# EAGLE board Rosi (EAGLE 7.2.0), part 1 of 2
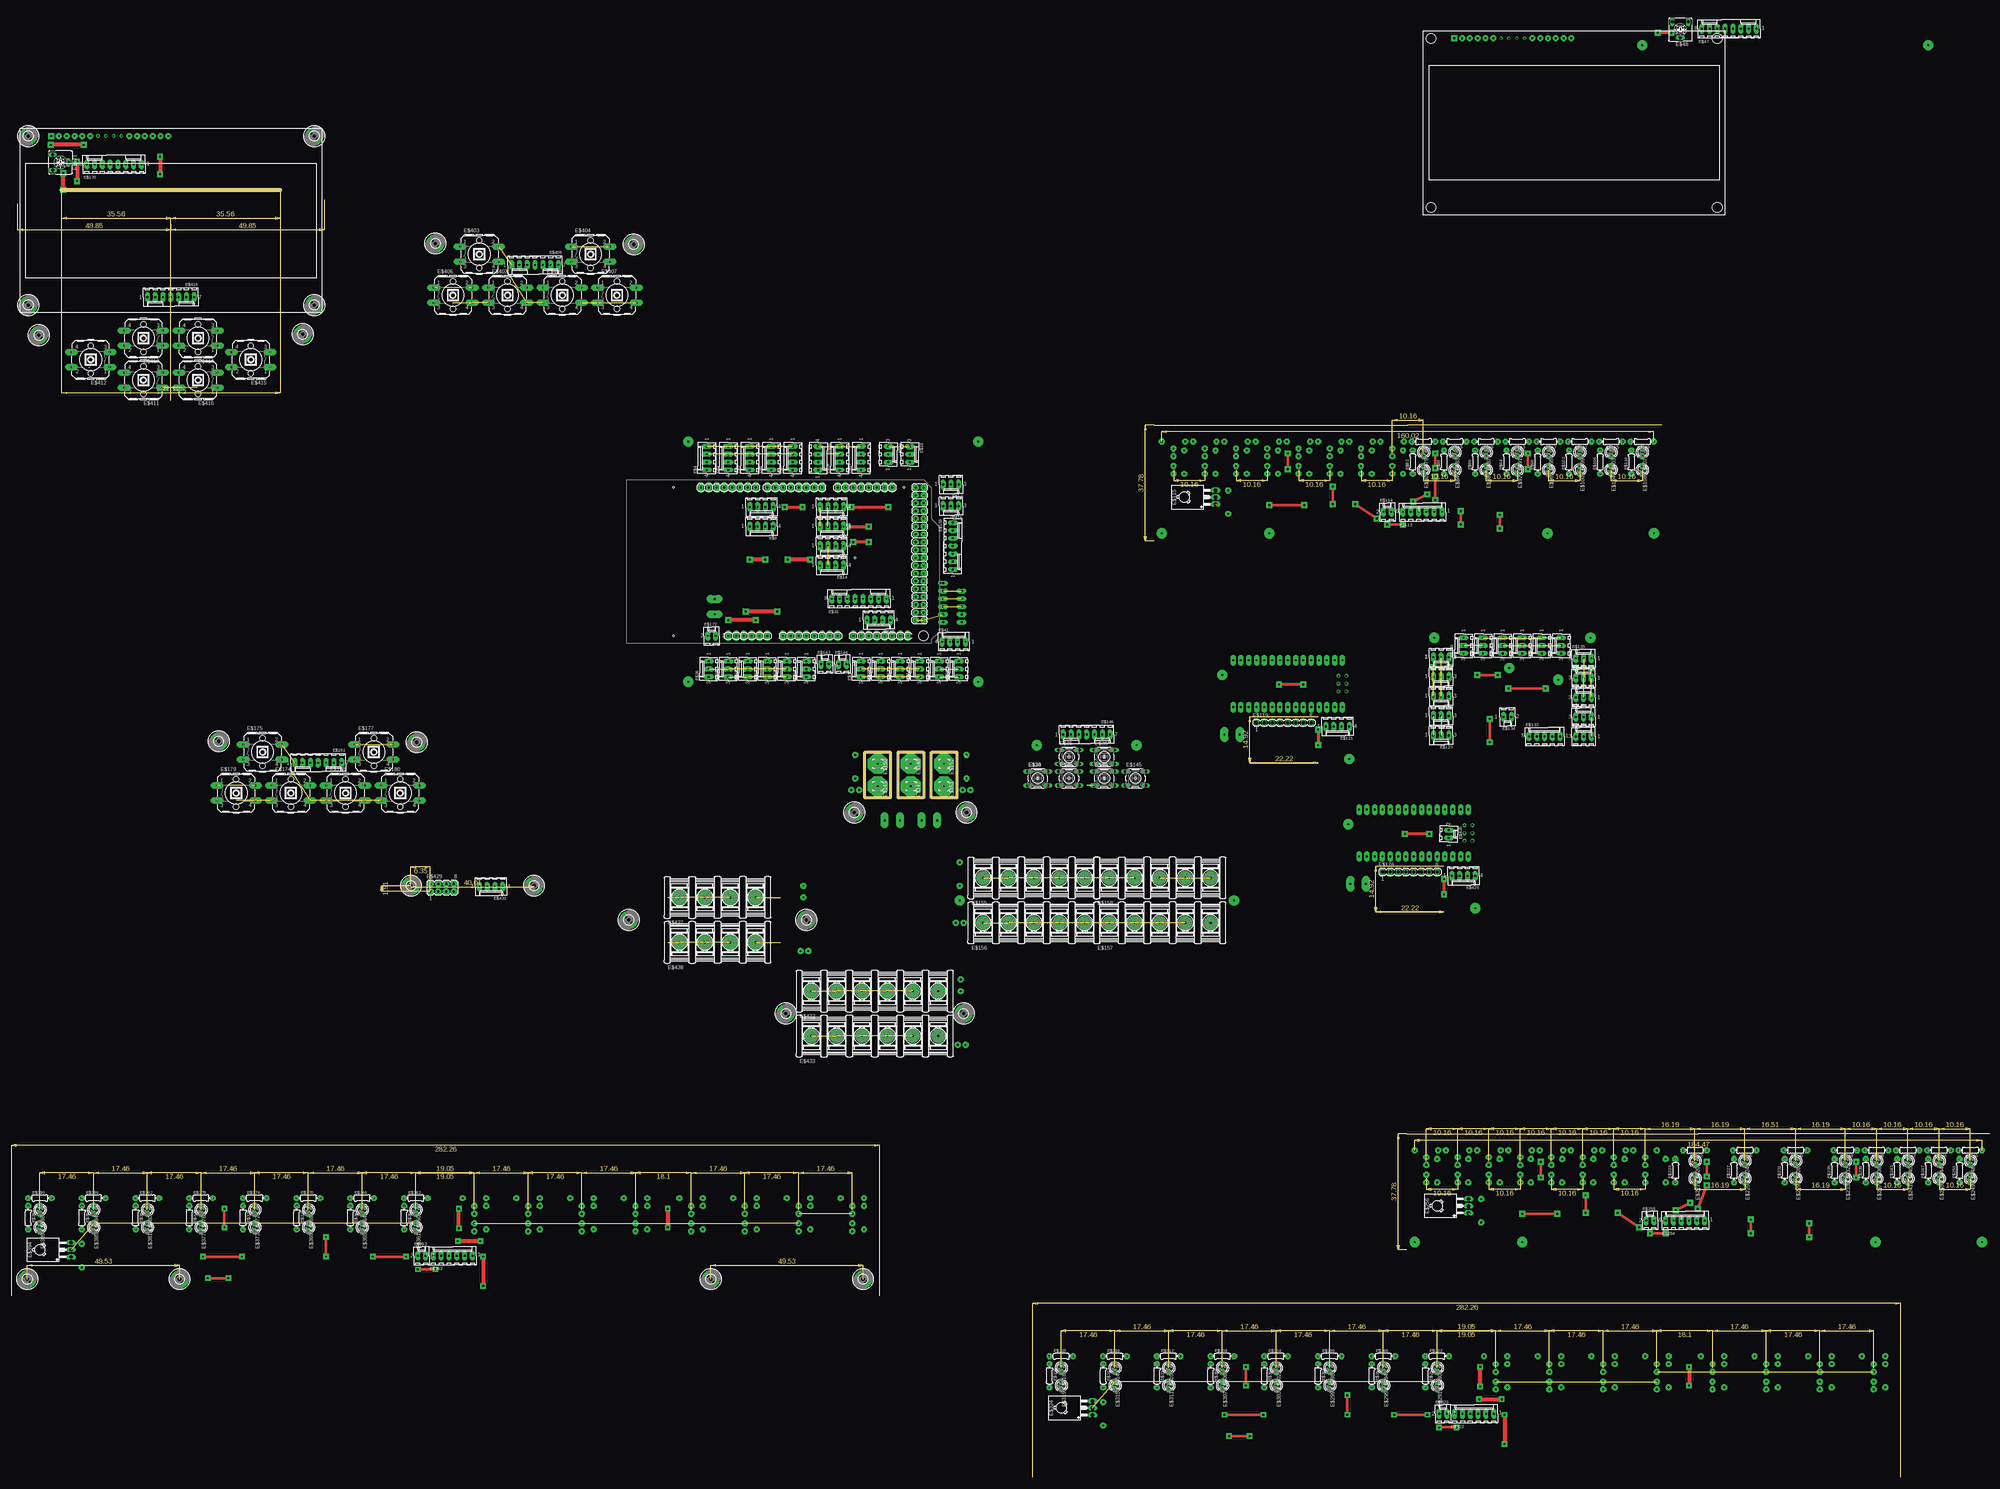
[diagram p0: board, top side]
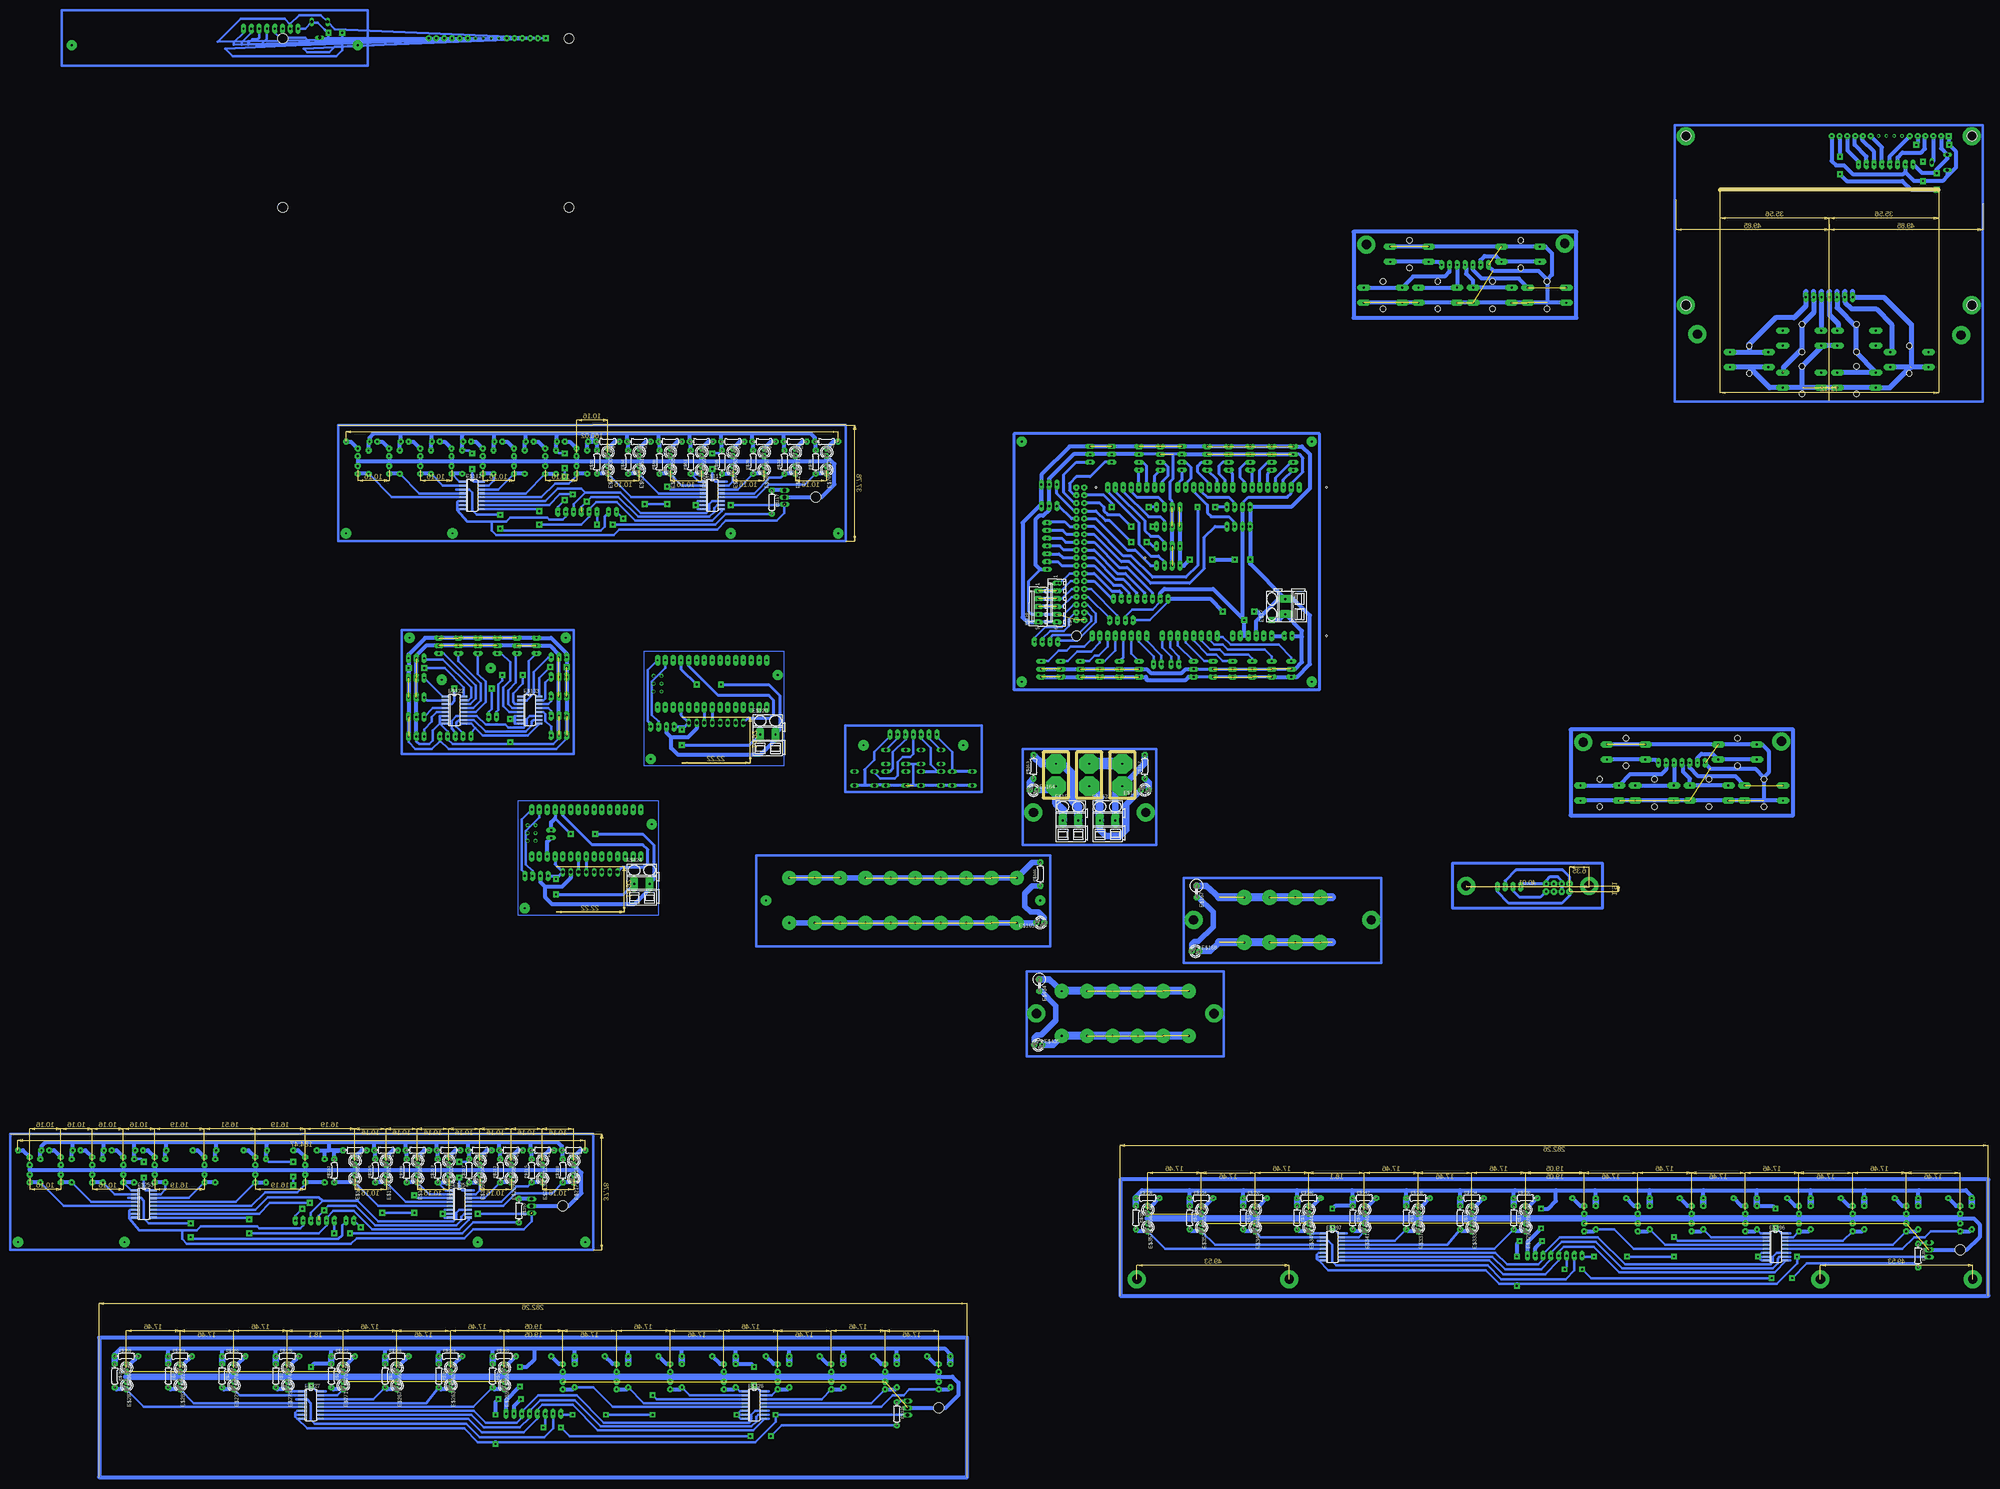
[diagram p1: board, bottom side, seen from below]

Size 291.15 x 197.8 mm. Coordinates in mm from the lower left corner, seen from the top.
Outline: 0,197.8 71.12,197.8
Outline: 261.3,14.92 269.56,14.92 269.56,0 261.3,0 261.3,14.92
Outline: 272.1,14.92 280.35,14.92 280.35,0 272.1,0 272.1,14.92
Outline: 282.89,14.92 291.15,14.92 291.15,0 282.89,0 282.89,14.92
Copper layers (1*16): Top 0.035mm / dielectric 1.5mm / Bottom 0.035mm
Design rules "default": minimum track width 10mil, minimum drill 24mil, track to track 8mil, track to pad 8mil, pad to pad 8mil, via to via 8mil, smd to smd 8mil, copper to edge 40mil, drill to drill 8mil, minimum pad ring 10mil, minimum via ring 8mil, stop-mask expansion 4mil, vias tented up to drill 0mil, thermal gap 10mil

## Footprints (pad centres in the part's own frame; a part is rotated, then mirrored left to right if it is on the bottom)
MEGA_ARDUINO = drill 0.6 pad 1.778 long: 1 -27.94,-19.05; 2 -25.4,-19.05; 3 -22.86,-19.05; 4 -20.32,-19.05; 5 -17.78,-19.05; 6 -15.24,-19.05; 7 -10.16,-19.05; 8 -7.62,-19.05; 9 -5.08,-19.05; 10 -2.54,-19.05; 11 0,-19.05; 12 2.54,-19.05; 13 5.08,-19.05; 14 7.62,-19.05; 15 12.7,-19.05; 16 15.24,-19.05; 17 17.78,-19.05; 18 20.32,-19.05; 19 22.86,-19.05; 20 25.4,-19.05; 21 27.94,-19.05; 22 30.48,-19.05; 23 25.4,29.21; 24 22.86,29.21; 25 20.32,29.21; 26 17.78,29.21; 27 15.24,29.21; 28 12.7,29.21; 29 10.16,29.21; 30 7.62,29.21; 31 2.54,29.21; 32 0,29.21; 33 -2.54,29.21; 34 -5.08,29.21; 35 -7.62,29.21; 36 -10.16,29.21; 37 -12.7,29.21; 38 -15.24,29.21; 39 -19.05,29.21; 40 -21.59,29.21; 41 -24.13,29.21; 42 -26.67,29.21; 43 -29.21,29.21; 44 -31.75,29.21; 45 -34.29,29.21; 46 -36.83,29.21 | drill 0.6 pad 1.93 octagon: 47 33.02,29.21; 48 35.56,29.21; 49 33.02,26.67; 50 35.56,26.67; 51 33.02,24.13; 52 35.56,24.13; 53 33.02,21.59; 54 35.56,21.59; 55 33.02,19.05; 56 35.56,19.05; 57 33.02,16.51; 58 35.56,16.51; 59 33.02,13.97; 60 35.56,13.97; 61 33.02,11.43; 62 35.56,11.43; 63 33.02,8.89; 64 35.56,8.89; 65 33.02,6.35; 66 35.56,6.35; 67 33.02,3.81; 68 35.56,3.81; 69 33.02,1.27; 70 35.56,1.27; 71 33.02,-1.27; 72 35.56,-1.27; 73 33.02,-3.81; 74 35.56,-3.81; 75 33.02,-6.35; 76 35.56,-6.35; 77 33.02,-8.89; 78 35.56,-8.89; 79 33.02,-11.43; 80 35.56,-11.43; 81 33.02,-13.97; 82 35.56,-13.97 | hole 0.6: -45.72,29.21; -45.72,-19.05; 29.21,29.21; 13.208,6.35 | hole 3.2: 35.56,-19.05
LCD-20X4-4HOLES = drill 0.6 pad 1.93 square: P$1 10,57.5 | drill 0.6 pad 1.93: P$2 12.54,57.5; P$3 15.08,57.5; P$4 17.62,57.5; P$5 20.16,57.5; P$6 22.7,57.5; P$11 35.4,57.5; P$12 37.94,57.5; P$13 40.48,57.5; P$14 43.02,57.5; P$15 45.56,57.5; P$16 48.1,57.5 | drill 0.5 pad 0.254: P$7 25.24,57.5; P$8 27.78,57.5; P$9 30.32,57.5; P$10 32.86,57.5 | hole 3.2: 2.5,2.5; 2.5,57.5; 95.5,57.5; 95.5,2.5
6410-04 = drill 0.6 pad 1.676 long: 1 3.81,0; 2 1.27,0; 3 -1.27,0; 4 -3.81,0
6410-06 = drill 0.6 pad 1.676 long: 1 6.35,0; 2 3.81,0; 3 1.27,0; 4 -1.27,0; 5 -3.81,0; 6 -6.35,0
6410-03 = drill 0.6 pad 1.676 long: 1 2.54,0; 2 0,0; 3 -2.54,0
B3F-10XX = drill 1.016 long: 1 -3.251,2.261; 2 3.251,2.261; 3 -3.251,-2.261; 4 3.251,-2.261
LED3MM = drill 0.6 pad 1.93 octagon: A -1.27,0; K 1.27,0
6410-08 = drill 0.6 pad 1.676 long: 1 8.89,0; 2 6.35,0; 3 3.81,0; 4 1.27,0; 5 -1.27,0; 6 -3.81,0; 7 -6.35,0; 8 -8.89,0
SMKDSP_1,5/2 = drill 0.6 pad 2.54 long: 1 -2.5,0; 2 2.5,0
CA6V = drill 1.016 long: A -2.54,-2.54; E 2.54,-2.54; S 0,2.54
0204/7 = drill 0.6 pad 1.93 octagon: 1 -3.81,0; 2 3.81,0
SO16 = smd 0.66 x 2.032: 1 -4.445,-3.073; 2 -3.175,-3.073; 3 -1.905,-3.073; 4 -0.635,-3.073; 5 0.635,-3.073; 6 1.905,-3.073; 7 3.175,-3.073; 8 4.445,-3.073; 9 4.445,3.073; 10 3.175,3.073; 11 1.905,3.073; 12 0.635,3.073; 13 -0.635,3.073; 14 -1.905,3.073; 15 -3.175,3.073; 16 -4.445,3.073
6410-02 = drill 0.6 pad 1.676 long: 1 1.27,0; 2 -1.27,0
TO126 = drill 1.118 long: 1 -2.286,-5.08; 2 0,-5.08; 3 2.286,-5.08 | hole 3.302: 0,5.08
6410-05 = drill 0.6 pad 1.676 long: 1 5.08,0; 2 2.54,0; 3 0,0; 4 -2.54,0; 5 -5.08,0
NANO = drill 0.6 pad 1.778 long: 3.3V -7.62,16.51; 5V -7.62,-8.89; A0 -7.62,11.43; A1 -7.62,8.89; A2 -7.62,6.35; A3 -7.62,3.81; A4 -7.62,1.27; A5 -7.62,-1.27; A6 -7.62,-3.81; A7 -7.62,-6.35; AREF -7.62,13.97; D2 7.62,-6.35; D3 7.62,-3.81; D4 7.62,-1.27; D5 7.62,1.27; D6 7.62,3.81; D7 7.62,6.35; D8 7.62,8.89; D9 7.62,11.43; D10 7.62,13.97; D11 7.62,16.51; D12 7.62,19.05; D13 -7.62,19.05; GND -7.62,-13.97; GND1 7.62,-8.89; RAW -7.62,-16.51; RST -7.62,-11.43; RST1 7.62,-11.43; RX1 7.62,-13.97; TX0 7.62,-16.51 | drill 0.6 pad 0.305: ICSP1 -2.54,-17.78; ICSP2 -2.54,-15.24; ICSP3 0,-17.78; ICSP4 0,-15.24; ICSP5 2.54,-17.78; ICSP6 2.54,-15.24
MA08-1 = drill 1.016 long: 1 -8.89,0; 2 -6.35,0; 3 -3.81,0; 4 -1.27,0; 5 1.27,0; 6 3.81,0; 7 6.35,0; 8 8.89,0
6410-07 = drill 0.6 pad 1.676 long: 1 7.62,0; 2 5.08,0; 3 2.54,0; 4 0,0; 5 -2.54,0; 6 -5.08,0; 7 -7.62,0
3,17/1,3 = drill 0.6 pad 6.452 octagon: 1 0,0
5202-05-N-02 = drill 0.6 pad 4.572: 1 -16.5,0; 2 -8.25,0; 3 0,0; 4 8.25,0; 5 16.5,0
0411V = drill 0.6 pad 1.93 octagon: 1 -2.54,0; 2 1.27,0
B3F-40XX = drill 0.6 pad 2.184 long: 1 -6.248,2.489; 2 6.248,2.489; 3 -6.248,-2.489; 4 6.248,-2.489 | hole 1.803: 0,-4.496; 0,4.496
3,0-PAD = drill 3 pad 5.842: B3,0 0,0
5202-04-N-02 = drill 0.6 pad 4.826: 1 -12.375,0; 2 -4.125,0; 3 4.125,0; 4 12.375,0
MA04-2 = drill 0.6 pad 2.032 octagon: 1 -3.81,-1.27; 2 -3.81,1.27; 3 -1.27,-1.27; 4 -1.27,1.27; 5 1.27,-1.27; 6 1.27,1.27; 7 3.81,-1.27; 8 3.81,1.27
5202-06-N-02 = drill 0.6 pad 4.572: 1 -20.625,0; 2 -12.375,0; 3 -4.125,0; 4 4.125,0; 5 12.375,0; 6 20.625,0

## Placement (x,y rotation side)
E$1  [MEGA_ARDUINO]  244.79,71.75 0 top
E$2  [LCD-20X4-4HOLES]  442.91,189.55 0 top  (outside the outline)
E$3  [6410-04]  216.85,110.49 90 top
E$4  [6410-04]  209.87,110.49 90 top
E$5  [6410-04]  223.84,110.49 90 top
E$6  [6410-04]  230.82,110.49 90 top
E$7  [6410-04]  237.81,110.49 90 top
E$8  [6410-06]  286.7,63.5 90 bottom
E$9  [6410-04]  227.65,88.27 180 top
E$10  [6410-04]  250.51,94.61 180 top
E$11  [6410-04]  250.51,88.27 180 top
E$12  [6410-04]  227.65,94.61 180 top
E$13  [6410-04]  250.51,81.91 180 top
E$14  [6410-04]  250.51,75.56 180 top
E$16  [6410-03]  289.24,94.93 180 top
E$17  [6410-03]  289.24,101.92 180 top
E$18  [6410-03]  275.91,111.76 270 top
E$19  [6410-03]  268.92,111.76 270 top
E$20  [B3F-10XX]  317.5,6.35 0 top  (outside the outline)
E$21  [6410-03]  223.2,41.91 90 top
E$22  [6410-03]  229.55,41.91 90 top
E$23  [6410-03]  235.9,41.91 90 top
E$24  [6410-03]  242.25,41.91 90 top
E$25  [6410-03]  216.85,41.91 90 top
E$26  [6410-03]  210.5,41.91 90 top
E$27  [6410-04]  260.03,110.49 90 top
E$28  [6410-04]  253.05,110.49 90 top
E$29  [6410-04]  246.06,110.49 270 top
E$30  [LED3MM]  432.75,112.39 270 bottom  (outside the outline)
E$31  [6410-08]  259.4,64.77 0 top
E$32  [6410-03]  260.03,41.91 90 top
E$33  [LED3MM]  432.75,106.68 270 bottom  (outside the outline)
E$34  [B3F-10XX]  317.5,6.35 0 top  (outside the outline)
E$35  [B3F-10XX]  327.66,6.35 0 top  (outside the outline)
E$36  [B3F-10XX]  327.66,13.33 0 top  (outside the outline)
E$37  [SMKDSP_1,5/2]  212.41,62.23 90 bottom
E$38  [B3F-10XX]  339.09,13.33 0 top  (outside the outline)
E$39  [6410-03]  266.38,41.91 90 top
E$40  [B3F-10XX]  339.09,6.35 0 top  (outside the outline)
E$41  [6410-04]  290.19,50.8 0 top
E$42  [6410-04]  265.75,57.78 180 top
E$43  [6410-03]  272.73,41.91 90 top
E$44  [6410-03]  279.08,41.91 90 top
E$45  [6410-03]  285.43,41.91 90 top
E$46  [6410-03]  291.78,41.91 90 top
E$47  [6410-08]  542.29,250.19 0 top  (outside the outline)
E$48  [CA6V]  526.41,249.87 180 top  (outside the outline)
E$49  [0204/7]  432.75,115.89 180 bottom  (outside the outline)
E$50  [0204/7]  436.25,109.22 90 bottom  (outside the outline)
E$51  [LED3MM]  422.59,112.39 270 bottom  (outside the outline)
E$52  [LED3MM]  422.59,106.68 270 bottom  (outside the outline)
E$53  [0204/7]  422.59,115.89 180 bottom  (outside the outline)
E$54  [0204/7]  426.09,109.22 90 bottom  (outside the outline)
E$55  [LED3MM]  412.43,112.39 270 bottom  (outside the outline)
E$56  [LED3MM]  412.43,106.68 270 bottom  (outside the outline)
E$57  [0204/7]  412.43,115.89 180 bottom  (outside the outline)
E$58  [0204/7]  415.93,109.22 90 bottom  (outside the outline)
E$59  [LED3MM]  402.27,112.39 270 bottom  (outside the outline)
E$60  [LED3MM]  402.27,106.68 270 bottom  (outside the outline)
E$61  [0204/7]  402.27,115.89 180 bottom  (outside the outline)
E$62  [0204/7]  405.76,109.22 90 bottom  (outside the outline)
E$63  [LED3MM]  392.11,112.39 270 bottom  (outside the outline)
E$64  [LED3MM]  392.11,106.68 270 bottom  (outside the outline)
E$65  [0204/7]  392.11,115.89 180 bottom  (outside the outline)
E$66  [0204/7]  395.61,109.22 90 bottom  (outside the outline)
E$67  [LED3MM]  381.95,112.39 270 bottom  (outside the outline)
E$68  [LED3MM]  381.95,106.68 270 bottom  (outside the outline)
E$69  [0204/7]  381.95,115.89 180 bottom  (outside the outline)
E$70  [0204/7]  385.44,109.22 90 bottom  (outside the outline)
E$71  [LED3MM]  371.79,112.39 270 bottom  (outside the outline)
E$72  [LED3MM]  371.79,106.68 270 bottom  (outside the outline)
E$73  [0204/7]  371.79,115.89 180 bottom  (outside the outline)
E$74  [0204/7]  375.28,109.22 90 bottom  (outside the outline)
E$75  [LED3MM]  361.63,112.39 270 bottom  (outside the outline)
E$76  [LED3MM]  361.63,106.68 270 bottom  (outside the outline)
E$77  [0204/7]  361.63,115.89 180 bottom  (outside the outline)
E$78  [0204/7]  365.12,109.22 90 bottom  (outside the outline)
E$79  [LED3MM]  442.91,112.39 270 top  (outside the outline)
E$80  [LED3MM]  442.91,106.68 270 top  (outside the outline)
E$81  [0204/7]  442.91,115.89 180 top  (outside the outline)
E$82  [0204/7]  439.42,109.22 90 top  (outside the outline)
E$83  [LED3MM]  453.07,112.39 270 top  (outside the outline)
E$84  [LED3MM]  453.07,106.68 270 top  (outside the outline)
E$85  [0204/7]  453.07,115.89 180 top  (outside the outline)
E$86  [0204/7]  449.58,109.22 90 top  (outside the outline)
E$87  [LED3MM]  463.23,112.39 270 top  (outside the outline)
E$88  [LED3MM]  463.23,106.68 270 top  (outside the outline)
E$89  [0204/7]  463.23,115.89 180 top  (outside the outline)
E$90  [0204/7]  459.74,109.22 90 top  (outside the outline)
E$91  [LED3MM]  473.39,112.39 270 top  (outside the outline)
E$92  [LED3MM]  473.39,106.68 270 top  (outside the outline)
E$93  [0204/7]  473.39,115.89 180 top  (outside the outline)
E$94  [0204/7]  469.9,109.22 90 top  (outside the outline)
E$95  [LED3MM]  483.55,112.39 270 top  (outside the outline)
E$96  [LED3MM]  483.55,106.68 270 top  (outside the outline)
E$97  [0204/7]  483.55,115.89 180 top  (outside the outline)
E$98  [0204/7]  480.06,109.22 90 top  (outside the outline)
E$99  [LED3MM]  493.71,112.39 270 top  (outside the outline)
E$100  [LED3MM]  493.71,106.68 270 top  (outside the outline)
E$101  [0204/7]  493.71,115.89 180 top  (outside the outline)
E$102  [0204/7]  490.22,109.22 90 top  (outside the outline)
E$103  [LED3MM]  503.87,112.39 270 top  (outside the outline)
E$104  [LED3MM]  503.87,106.68 270 top  (outside the outline)
E$105  [0204/7]  503.87,115.89 180 top  (outside the outline)
E$106  [0204/7]  500.38,109.22 90 top  (outside the outline)
E$107  [LED3MM]  514.03,112.39 270 top  (outside the outline)
E$108  [LED3MM]  514.03,106.68 270 top  (outside the outline)
E$109  [0204/7]  514.03,115.89 180 top  (outside the outline)
E$110  [0204/7]  510.54,109.22 90 top  (outside the outline)
E$111  [SO16]  398.78,98.42 270 bottom  (outside the outline)
E$112  [SO16]  476.88,98.42 270 bottom  (outside the outline)
E$113  [6410-06]  442.6,93.03 0 top  (outside the outline)
E$114  [6410-02]  431.16,93.03 0 top  (outside the outline)
E$115  [TO126]  370.2,97.79 90 top  (outside the outline)
E$116  [6410-05]  292.74,62.23 90 bottom
E$117  [0204/7]  379.41,96.2 270 bottom  (outside the outline)
E$118  [NANO]  400.05,37.15 90 top  (outside the outline)
E$119  [MA08-1]  397.51,24.45 0 top  (outside the outline)
E$120  [SMKDSP_1,5/2]  380.68,20.64 0 bottom  (outside the outline)
E$121  [6410-04]  414.97,23.18 180 top  (outside the outline)
E$122  [SO16]  482.6,28.57 270 bottom  (outside the outline)
E$123  [6410-03]  448.63,20.32 180 top  (outside the outline)
E$124  [6410-03]  448.63,26.67 180 top  (outside the outline)
E$125  [6410-03]  448.63,33.02 180 top  (outside the outline)
E$126  [6410-03]  448.63,39.37 180 top  (outside the outline)
E$127  [6410-03]  448.63,45.72 180 top  (outside the outline)
E$128  [6410-03]  448.63,45.72 180 top  (outside the outline)
E$129  [6410-03]  474.98,49.53 90 top  (outside the outline)
E$130  [6410-03]  468.63,49.53 90 top  (outside the outline)
E$131  [6410-03]  462.28,49.53 90 top  (outside the outline)
E$132  [6410-05]  482.28,20 0 top  (outside the outline)
E$133  [SO16]  458.15,28.57 270 bottom  (outside the outline)
E$134  [6410-02]  470.22,26.35 180 top  (outside the outline)
E$135  [6410-03]  494.98,45.4 0 top  (outside the outline)
E$136  [6410-03]  494.98,39.05 0 top  (outside the outline)
E$137  [6410-03]  494.98,32.7 0 top  (outside the outline)
E$138  [6410-03]  494.98,26.35 0 top  (outside the outline)
E$139  [6410-03]  494.98,20 0 top  (outside the outline)
E$140  [6410-03]  455.93,49.53 90 top  (outside the outline)
E$141  [6410-03]  481.33,49.53 90 top  (outside the outline)
E$142  [6410-03]  487.68,49.53 90 top  (outside the outline)
E$143  [6410-02]  248.28,43.5 0 top
E$144  [6410-02]  254,43.5 0 top
E$145  [B3F-10XX]  349.25,6.35 0 top  (outside the outline)
E$146  [6410-07]  333.38,20.64 180 top  (outside the outline)
E$147  [3,17/1,3]  276.23,3.81 270 top
E$148  [3,17/1,3]  276.23,11.11 270 top
E$149  [3,17/1,3]  265.43,3.81 270 top
E$150  [3,17/1,3]  265.43,11.11 270 top
E$151  [3,17/1,3]  287.02,3.81 270 top
E$152  [3,17/1,3]  287.02,11.11 270 top
E$153  [SMKDSP_1,5/2]  270.19,-7.3 0 bottom  (outside the outline)
E$154  [SMKDSP_1,5/2]  282.26,-7.3 0 bottom  (outside the outline)
E$155  [5202-05-N-02]  316.23,-26.04 0 top  (outside the outline)
E$156  [5202-05-N-02]  316.23,-40.64 0 top  (outside the outline)
E$157  [5202-05-N-02]  357.19,-40.64 0 top  (outside the outline)
E$158  [5202-05-N-02]  357.19,-26.04 0 top  (outside the outline)
E$159  [6410-07]  289.88,81.91 270 top
E$161  [LED3MM]  258.13,2.54 180 bottom
E$162  [0204/7]  258.13,10.16 90 bottom
E$163  [0204/7]  294.32,10.16 90 bottom  (outside the outline)
E$164  [LED3MM]  294.32,2.54 0 bottom
E$165  [LED3MM]  292.1,-40.64 180 bottom  (outside the outline)
E$166  [0204/7]  292.1,-24.77 90 bottom  (outside the outline)
E$167  [0411V]  241.3,-31.12 270 bottom  (outside the outline)
E$168  [LED3MM]  241.62,-49.85 0 bottom  (outside the outline)
E$169  [LCD-20X4-4HOLES]  -13.34,157.8 0 top
E$170  [6410-08]  17.15,206.06 0 top  (outside the outline)
E$171  [CA6V]  -0.32,206.69 270 top  (outside the outline)
E$172  [6410-02]  211.45,52.7 0 top
E$173  [NANO]  441.01,-11.43 90 top  (outside the outline)
E$174  [B3F-40XX]  74.61,1.59 0 top
E$175  [B3F-40XX]  65.41,14.92 0 top
E$176  [MA08-1]  438.47,-24.13 0 top  (outside the outline)
E$177  [B3F-40XX]  101.6,14.92 0 top
E$178  [B3F-40XX]  92.39,1.59 0 top
E$179  [B3F-40XX]  56.83,1.59 0 top
E$180  [B3F-40XX]  110.17,1.59 0 top
E$181  [6410-07]  83.5,11.43 180 top
E$182  [3,0-PAD]  51.12,18.41 0 top
E$183  [3,0-PAD]  115.57,18.1 0 top
E$184  [3,0-PAD]  184.47,-39.69 0 top  (outside the outline)
E$185  [3,0-PAD]  242.25,-39.69 0 top  (outside the outline)
E$186  [3,0-PAD]  257.81,-4.76 0 top  (outside the outline)
E$187  [3,0-PAD]  294.32,-4.76 0 top  (outside the outline)
E$188  [LED3MM]  514.99,-118.11 270 bottom  (outside the outline)
E$189  [LED3MM]  514.99,-123.83 270 bottom  (outside the outline)
E$190  [0204/7]  514.99,-114.62 180 bottom  (outside the outline)
E$191  [0204/7]  521.65,-121.28 90 bottom  (outside the outline)
E$192  [LED3MM]  504.82,-118.11 270 bottom  (outside the outline)
E$193  [LED3MM]  504.82,-123.83 270 bottom  (outside the outline)
E$194  [0204/7]  504.82,-114.62 180 bottom  (outside the outline)
E$195  [0204/7]  508.32,-121.28 90 bottom  (outside the outline)
E$196  [LED3MM]  494.66,-118.11 270 bottom  (outside the outline)
E$197  [LED3MM]  494.66,-123.83 270 bottom  (outside the outline)
E$198  [0204/7]  494.66,-114.62 180 bottom  (outside the outline)
E$199  [0204/7]  498.16,-121.28 90 bottom  (outside the outline)
E$200  [LED3MM]  484.5,-118.11 270 bottom  (outside the outline)
E$201  [LED3MM]  484.5,-123.83 270 bottom  (outside the outline)
E$202  [0204/7]  484.5,-114.62 180 bottom  (outside the outline)
E$203  [0204/7]  488,-121.28 90 bottom  (outside the outline)
E$204  [LED3MM]  474.35,-118.11 270 bottom  (outside the outline)
E$205  [LED3MM]  474.35,-123.83 270 bottom  (outside the outline)
E$206  [0204/7]  474.35,-114.62 180 bottom  (outside the outline)
E$207  [0204/7]  477.84,-121.28 90 bottom  (outside the outline)
E$208  [LED3MM]  464.19,-118.11 270 bottom  (outside the outline)
E$209  [LED3MM]  464.19,-123.83 270 bottom  (outside the outline)
E$210  [0204/7]  464.19,-114.62 180 bottom  (outside the outline)
E$211  [0204/7]  467.68,-121.28 90 bottom  (outside the outline)
E$212  [LED3MM]  454.02,-118.11 270 bottom  (outside the outline)
E$213  [LED3MM]  454.02,-123.83 270 bottom  (outside the outline)
E$214  [0204/7]  454.02,-114.62 180 bottom  (outside the outline)
E$215  [0204/7]  457.52,-121.28 90 bottom  (outside the outline)
E$216  [LED3MM]  443.87,-118.11 270 bottom  (outside the outline)
E$217  [LED3MM]  443.87,-123.83 270 bottom  (outside the outline)
E$218  [0204/7]  443.87,-114.62 180 bottom  (outside the outline)
E$219  [0204/7]  447.36,-121.28 90 bottom  (outside the outline)
E$220  [LED3MM]  531.18,-118.11 270 top  (outside the outline)
E$221  [LED3MM]  531.18,-123.83 270 top  (outside the outline)
E$222  [0204/7]  531.18,-114.62 180 top  (outside the outline)
E$223  [0204/7]  524.83,-121.28 90 top  (outside the outline)
E$224  [LED3MM]  547.37,-118.11 270 top  (outside the outline)
E$225  [LED3MM]  547.37,-123.83 270 top  (outside the outline)
E$226  [0204/7]  547.37,-114.62 180 top  (outside the outline)
E$227  [0204/7]  543.88,-121.28 90 top  (outside the outline)
E$228  [LED3MM]  563.88,-118.11 270 top  (outside the outline)
E$229  [LED3MM]  563.88,-123.83 270 top  (outside the outline)
E$230  [0204/7]  563.88,-114.62 180 top  (outside the outline)
E$231  [0204/7]  560.39,-121.28 90 top  (outside the outline)
E$232  [LED3MM]  580.07,-118.11 270 top  (outside the outline)
E$233  [LED3MM]  580.07,-123.83 270 top  (outside the outline)
E$234  [0204/7]  580.07,-114.62 180 top  (outside the outline)
E$235  [0204/7]  576.58,-121.28 90 top  (outside the outline)
E$236  [LED3MM]  590.23,-118.11 270 top  (outside the outline)
E$237  [LED3MM]  590.23,-123.83 270 top  (outside the outline)
E$238  [0204/7]  590.23,-114.62 180 top  (outside the outline)
E$239  [0204/7]  586.74,-121.28 90 top  (outside the outline)
E$240  [LED3MM]  600.39,-118.11 270 top  (outside the outline)
E$241  [LED3MM]  600.39,-123.83 270 top  (outside the outline)
E$242  [0204/7]  600.39,-114.62 180 top  (outside the outline)
E$243  [0204/7]  596.9,-121.28 90 top  (outside the outline)
E$244  [LED3MM]  610.55,-118.11 270 top  (outside the outline)
E$245  [LED3MM]  610.55,-123.83 270 top  (outside the outline)
E$246  [0204/7]  610.55,-114.62 180 top  (outside the outline)
E$247  [0204/7]  607.06,-121.28 90 top  (outside the outline)
E$248  [LED3MM]  620.71,-118.11 270 top  (outside the outline)
E$249  [LED3MM]  620.71,-123.83 270 top  (outside the outline)
E$250  [0204/7]  620.71,-114.62 180 top  (outside the outline)
E$251  [0204/7]  617.22,-121.28 90 top  (outside the outline)
E$252  [SO16]  481.01,-132.08 270 bottom  (outside the outline)
E$253  [SO16]  583.57,-132.08 270 bottom  (outside the outline)
E$254  [6410-06]  528,-137.48 0 top  (outside the outline)
E$255  [6410-02]  516.57,-137.48 0 top  (outside the outline)
E$256  [TO126]  452.44,-132.72 90 top  (outside the outline)
E$257  [0204/7]  461.64,-134.3 270 bottom  (outside the outline)
E$258  [LED3MM]  466.41,-185.42 270 bottom  (outside the outline)
E$259  [LED3MM]  466.41,-191.14 270 bottom  (outside the outline)
E$260  [0204/7]  466.41,-181.61 0 bottom  (outside the outline)
E$261  [0204/7]  470.22,-187.96 270 bottom  (outside the outline)
E$262  [LED3MM]  483.87,-185.42 270 bottom  (outside the outline)
E$263  [LED3MM]  483.87,-191.14 270 bottom  (outside the outline)
E$264  [0204/7]  483.87,-181.61 0 bottom  (outside the outline)
E$265  [0204/7]  487.68,-187.96 270 bottom  (outside the outline)
E$266  [LED3MM]  501.33,-185.42 270 bottom  (outside the outline)
E$267  [LED3MM]  501.33,-191.14 270 bottom  (outside the outline)
E$268  [0204/7]  501.33,-181.61 0 bottom  (outside the outline)
E$269  [0204/7]  505.14,-187.96 270 bottom  (outside the outline)
E$270  [LED3MM]  518.8,-185.42 270 bottom  (outside the outline)
E$271  [LED3MM]  518.8,-191.14 270 bottom  (outside the outline)
E$272  [0204/7]  518.8,-181.61 0 bottom  (outside the outline)
E$273  [0204/7]  522.61,-187.96 270 bottom  (outside the outline)
E$274  [LED3MM]  536.89,-185.42 270 bottom  (outside the outline)
E$275  [LED3MM]  536.89,-191.14 270 bottom  (outside the outline)
E$276  [0204/7]  536.89,-181.61 0 bottom  (outside the outline)
E$277  [0204/7]  540.7,-187.96 270 bottom  (outside the outline)
E$278  [LED3MM]  554.36,-185.42 270 bottom  (outside the outline)
E$279  [LED3MM]  554.36,-191.14 270 bottom  (outside the outline)
E$280  [0204/7]  554.36,-181.61 0 bottom  (outside the outline)
E$281  [0204/7]  558.16,-187.96 270 bottom  (outside the outline)
E$282  [LED3MM]  571.82,-185.42 270 bottom  (outside the outline)
E$283  [LED3MM]  571.82,-191.14 270 bottom  (outside the outline)
E$284  [0204/7]  571.82,-181.61 0 bottom  (outside the outline)
E$285  [0204/7]  575.63,-187.96 270 bottom  (outside the outline)
E$286  [LED3MM]  589.28,-185.42 270 bottom  (outside the outline)
E$287  [LED3MM]  589.28,-191.14 270 bottom  (outside the outline)
E$288  [0204/7]  589.28,-181.61 0 bottom  (outside the outline)
E$289  [0204/7]  593.09,-187.96 270 bottom  (outside the outline)
E$290  [LED3MM]  447.36,-185.42 270 top  (outside the outline)
E$291  [LED3MM]  447.36,-191.14 270 top  (outside the outline)
E$292  [0204/7]  447.36,-181.61 0 top  (outside the outline)
E$293  [0204/7]  443.55,-187.96 270 top  (outside the outline)
E$294  [LED3MM]  429.89,-185.42 270 top  (outside the outline)
E$295  [LED3MM]  429.89,-191.14 270 top  (outside the outline)
E$296  [0204/7]  429.89,-181.61 0 top  (outside the outline)
E$297  [0204/7]  426.09,-187.96 270 top  (outside the outline)
E$298  [LED3MM]  412.43,-185.42 270 top  (outside the outline)
E$299  [LED3MM]  412.43,-191.14 270 top  (outside the outline)
E$300  [0204/7]  412.43,-181.61 0 top  (outside the outline)
E$301  [0204/7]  408.62,-187.96 270 top  (outside the outline)
E$302  [LED3MM]  394.97,-185.42 270 top  (outside the outline)
E$303  [LED3MM]  394.97,-191.14 270 top  (outside the outline)
E$304  [0204/7]  394.97,-181.61 0 top  (outside the outline)
E$305  [0204/7]  391.16,-187.96 270 top  (outside the outline)
E$306  [LED3MM]  377.51,-185.42 270 top  (outside the outline)
E$307  [LED3MM]  377.51,-191.14 270 top  (outside the outline)
E$308  [0204/7]  377.51,-181.61 0 top  (outside the outline)
E$309  [0204/7]  373.7,-187.96 270 top  (outside the outline)
E$310  [LED3MM]  360.05,-185.42 270 top  (outside the outline)
E$311  [LED3MM]  360.05,-191.14 270 top  (outside the outline)
E$312  [0204/7]  360.05,-181.61 0 top  (outside the outline)
E$313  [0204/7]  356.24,-187.96 270 top  (outside the outline)
E$314  [LED3MM]  342.58,-185.42 270 top  (outside the outline)
E$315  [LED3MM]  342.58,-191.14 270 top  (outside the outline)
E$316  [0204/7]  342.58,-181.61 0 top  (outside the outline)
E$317  [0204/7]  338.77,-187.96 270 top  (outside the outline)
E$318  [LED3MM]  325.12,-185.42 270 top  (outside the outline)
E$319  [LED3MM]  325.12,-191.14 270 top  (outside the outline)
E$320  [0204/7]  325.12,-181.61 0 top  (outside the outline)
E$321  [0204/7]  321.31,-187.96 270 top  (outside the outline)
E$322  [6410-06]  459.42,-200.34 0 top  (outside the outline)
E$323  [6410-02]  449.26,-200.34 0 top  (outside the outline)
E$324  [TO126]  330.2,-198.44 90 top  (outside the outline)
E$325  [0204/7]  338.77,-200.34 270 bottom  (outside the outline)
E$326  [SO16]  385.13,-197.48 270 bottom  (outside the outline)
E$327  [SO16]  529.27,-197.48 270 bottom  (outside the outline)
E$328  [LED3MM]  134.3,-133.99 270 bottom  (outside the outline)
E$329  [LED3MM]  134.3,-139.7 270 bottom  (outside the outline)
E$330  [0204/7]  134.3,-130.18 0 bottom  (outside the outline)
E$331  [0204/7]  138.11,-136.53 270 bottom  (outside the outline)
E$332  [LED3MM]  151.76,-133.99 270 bottom  (outside the outline)
E$333  [LED3MM]  151.76,-139.7 270 bottom  (outside the outline)
E$334  [0204/7]  151.76,-130.18 0 bottom  (outside the outline)
E$335  [0204/7]  155.57,-136.53 270 bottom  (outside the outline)
E$336  [LED3MM]  169.23,-133.99 270 bottom  (outside the outline)
E$337  [LED3MM]  169.23,-139.7 270 bottom  (outside the outline)
E$338  [0204/7]  169.23,-130.18 0 bottom  (outside the outline)
E$339  [0204/7]  173.04,-136.53 270 bottom  (outside the outline)
E$340  [LED3MM]  186.69,-133.99 270 bottom  (outside the outline)
E$341  [LED3MM]  186.69,-139.7 270 bottom  (outside the outline)
E$342  [0204/7]  186.69,-130.18 0 bottom  (outside the outline)
E$343  [0204/7]  190.5,-136.53 270 bottom  (outside the outline)
E$344  [LED3MM]  204.79,-133.99 270 bottom  (outside the outline)
E$345  [LED3MM]  204.79,-139.7 270 bottom  (outside the outline)
E$346  [0204/7]  204.79,-130.18 0 bottom  (outside the outline)
E$347  [0204/7]  208.6,-136.53 270 bottom  (outside the outline)
E$348  [LED3MM]  222.25,-133.99 270 bottom  (outside the outline)
E$349  [LED3MM]  222.25,-139.7 270 bottom  (outside the outline)
E$350  [0204/7]  222.25,-130.18 0 bottom  (outside the outline)
E$351  [0204/7]  226.06,-136.53 270 bottom  (outside the outline)
E$352  [LED3MM]  239.71,-133.99 270 bottom  (outside the outline)
E$353  [LED3MM]  239.71,-139.7 270 bottom  (outside the outline)
E$354  [0204/7]  239.71,-130.18 0 bottom  (outside the outline)
E$355  [0204/7]  243.52,-136.53 270 bottom  (outside the outline)
E$356  [LED3MM]  257.18,-133.99 270 bottom  (outside the outline)
E$357  [LED3MM]  257.18,-139.7 270 bottom  (outside the outline)
E$358  [0204/7]  257.18,-130.18 0 bottom  (outside the outline)
E$359  [0204/7]  260.99,-136.53 270 bottom  (outside the outline)
E$360  [LED3MM]  115.25,-133.99 270 top  (outside the outline)
E$361  [LED3MM]  115.25,-139.7 270 top  (outside the outline)
E$362  [0204/7]  115.25,-130.18 0 top  (outside the outline)
E$363  [0204/7]  111.44,-136.53 270 top  (outside the outline)
E$364  [LED3MM]  97.79,-133.99 270 top  (outside the outline)
E$365  [LED3MM]  97.79,-139.7 270 top  (outside the outline)
E$366  [0204/7]  97.79,-130.18 0 top  (outside the outline)
E$367  [0204/7]  93.98,-136.53 270 top  (outside the outline)
E$368  [LED3MM]  80.33,-133.99 270 top  (outside the outline)
E$369  [LED3MM]  80.33,-139.7 270 top  (outside the outline)
E$370  [0204/7]  80.33,-130.18 0 top  (outside the outline)
E$371  [0204/7]  76.52,-136.53 270 top  (outside the outline)
E$372  [LED3MM]  62.87,-133.99 270 top  (outside the outline)
E$373  [LED3MM]  62.87,-139.7 270 top  (outside the outline)
E$374  [0204/7]  62.87,-130.18 0 top  (outside the outline)
E$375  [0204/7]  59.06,-136.53 270 top  (outside the outline)
E$376  [LED3MM]  45.4,-133.99 270 top  (outside the outline)
E$377  [LED3MM]  45.4,-139.7 270 top  (outside the outline)
E$378  [0204/7]  45.4,-130.18 0 top  (outside the outline)
E$379  [0204/7]  41.59,-136.53 270 top  (outside the outline)
E$380  [LED3MM]  27.94,-133.99 270 top  (outside the outline)
E$381  [LED3MM]  27.94,-139.7 270 top  (outside the outline)
E$382  [0204/7]  27.94,-130.18 0 top  (outside the outline)
E$383  [0204/7]  24.13,-136.53 270 top  (outside the outline)
E$384  [LED3MM]  10.48,-133.99 270 top  (outside the outline)
E$385  [LED3MM]  10.48,-139.7 270 top  (outside the outline)
E$386  [0204/7]  10.48,-130.18 0 top  (outside the outline)
E$387  [0204/7]  6.67,-136.53 270 top  (outside the outline)
E$388  [LED3MM]  -6.99,-133.99 270 top  (outside the outline)
E$389  [LED3MM]  -6.99,-139.7 270 top  (outside the outline)
E$390  [0204/7]  -6.99,-130.18 0 top  (outside the outline)
E$391  [0204/7]  -10.8,-136.53 270 top  (outside the outline)
E$392  [6410-06]  127.32,-148.91 0 top  (outside the outline)
E$393  [6410-02]  117.16,-148.91 0 top  (outside the outline)
E$394  [TO126]  -1.91,-147 90 top  (outside the outline)
E$395  [0204/7]  6.67,-148.91 270 bottom  (outside the outline)
E$396  [SO16]  53.02,-146.05 270 bottom  (outside the outline)
E$397  [SO16]  197.17,-146.05 270 bottom  (outside the outline)
E$398  [3,0-PAD]  -11.11,-156.53 0 top  (outside the outline)
E$399  [3,0-PAD]  260.67,-156.53 0 top  (outside the outline)
E$400  [3,0-PAD]  211.14,-156.53 0 top  (outside the outline)
E$401  [3,0-PAD]  38.42,-156.53 0 top  (outside the outline)
E$402  [B3F-40XX]  145.1,163.51 0 top
E$403  [B3F-40XX]  135.89,176.85 0 top
E$404  [B3F-40XX]  172.08,176.85 0 top
E$405  [B3F-40XX]  162.88,163.51 0 top
E$406  [B3F-40XX]  127.32,163.51 0 top
E$407  [B3F-40XX]  180.66,163.51 0 top
E$408  [6410-07]  153.99,173.35 180 top
E$409  [3,0-PAD]  121.6,180.34 0 top
E$410  [3,0-PAD]  186.06,180.02 0 top
E$411  [B3F-40XX]  26.67,135.89 180 top
E$412  [B3F-40XX]  9.53,142.56 180 top
E$413  [B3F-40XX]  26.67,149.54 180 top
E$414  [B3F-40XX]  44.45,149.54 180 top
E$415  [B3F-40XX]  61.59,142.56 180 top
E$416  [B3F-40XX]  44.45,135.89 180 top
E$417  [3,0-PAD]  -7.3,150.5 0 top  (outside the outline)
E$418  [3,0-PAD]  78.42,150.81 0 top
E$419  [6410-07]  35.56,162.88 180 top
E$420  [3,0-PAD]  -10.8,160.34 0 top  (outside the outline)
E$421  [3,0-PAD]  82.23,160.34 0 top
E$422  [3,0-PAD]  -10.8,215.26 0 top  (outside the outline)
E$423  [3,0-PAD]  82.23,215.26 0 top  (outside the outline)
E$424  [SMKDSP_1,5/2]  421.64,-27.94 0 bottom  (outside the outline)
E$425  [6410-04]  455.93,-25.4 180 top  (outside the outline)
E$426  [6410-02]  451.17,-11.75 270 top  (outside the outline)
E$427  [5202-04-N-02]  213.36,-32.39 0 top  (outside the outline)
E$428  [3,0-PAD]  113.66,-28.58 0 top  (outside the outline)
E$429  [MA04-2]  123.83,-29.21 0 top  (outside the outline)
E$430  [3,0-PAD]  153.67,-28.58 0 top  (outside the outline)
E$431  [6410-04]  139.7,-28.89 180 top  (outside the outline)
E$432  [5202-06-N-02]  264.48,-62.87 0 top  (outside the outline)
E$433  [5202-06-N-02]  264.48,-77.47 0 top  (outside the outline)
E$434  [0411V]  292.42,-61.59 270 bottom  (outside the outline)
E$435  [LED3MM]  292.74,-80.33 0 bottom  (outside the outline)
E$436  [3,0-PAD]  235.59,-70.17 0 top  (outside the outline)
E$437  [3,0-PAD]  293.37,-70.17 0 top  (outside the outline)
E$438  [5202-04-N-02]  213.36,-46.99 0 top  (outside the outline)

## Library data of the parts
E$1 = arduino
E$2 E$169 = HD44780LCD
E$3-E$14 E$16-E$19 E$21-E$29 E$31 E$32 E$39 E$41-E$47 E$113 E$114 E$116 E$121 E$123-E$132 E$134-E$144 E$146 E$159 E$170 E$172 E$181 E$254 E$255 E$322 E$323 E$392 E$393 E$408 E$419 E$425 E$426 E$431 = con-molex
E$20 E$34-E$36 E$38 E$40 E$145 E$174 E$175 E$177-E$180 E$402-E$407 E$411-E$416 = switch-omron
E$30 E$33 E$51 E$52 E$55 E$56 E$59 E$60 E$63 E$64 E$67 E$68 E$71 E$72 E$75 E$76 E$79 E$80 E$83 E$84 E$87 E$88 E$91 E$92 E$95 E$96 E$99 E$100 E$103 E$104 E$107 E$108 E$161 E$164 E$165 E$168 E$188 E$189 E$192 E$193 E$196 E$197 E$200 E$201 E$204 E$205 E$208 E$209 E$212 E$213 E$216 E$217 E$220 E$221 E$224 E$225 E$228 E$229 E$232 E$233 E$236 E$237 E$240 E$241 E$244 E$245 E$248 E$249 E$258 E$259 E$262 E$263 E$266 E$267 E$270 E$271 E$274 E$275 E$278 E$279 E$282 E$283 E$286 E$287 E$290 E$291 E$294 E$295 E$298 E$299 E$302 E$303 E$306 E$307 E$310 E$311 E$314 E$315 E$318 E$319 E$328 E$329 E$332 E$333 E$336 E$337 E$340 E$341 E$344 E$345 E$348 E$349 E$352 E$353 E$356 E$357 E$360 E$361 E$364 E$365 E$368 E$369 E$372 E$373 E$376 E$377 E$380 E$381 E$384 E$385 E$388 E$389 E$435 = led
E$37 E$120 E$153 E$154 E$424 = con-phoenix-smkdsp
E$48 E$171 = pot
E$49 E$50 E$53 E$54 E$57 E$58 E$61 E$62 E$65 E$66 E$69 E$70 E$73 E$74 E$77 E$78 E$81 E$82 E$85 E$86 E$89 E$90 E$93 E$94 E$97 E$98 E$101 E$102 E$105 E$106 E$109 E$110 E$117 E$162 E$163 E$166 E$167 E$190 E$191 E$194 E$195 E$198 E$199 E$202 E$203 E$206 E$207 E$210 E$211 E$214 E$215 E$218 E$219 E$222 E$223 E$226 E$227 E$230 E$231 E$234 E$235 E$238 E$239 E$242 E$243 E$246 E$247 E$250 E$251 E$257 E$260 E$261 E$264 E$265 E$268 E$269 E$272 E$273 E$276 E$277 E$280 E$281 E$284 E$285 E$288 E$289 E$292 E$293 E$296 E$297 E$300 E$301 E$304 E$305 E$308 E$309 E$312 E$313 E$316 E$317 E$320 E$321 E$325 E$330 E$331 E$334 E$335 E$338 E$339 E$342 E$343 E$346 E$347 E$350 E$351 E$354 E$355 E$358 E$359 E$362 E$363 E$366 E$367 E$370 E$371 E$374 E$375 E$378 E$379 E$382 E$383 E$386 E$387 E$390 E$391 E$395 E$434 = resistor
E$111 E$112 E$122 E$133 E$252 E$253 E$326 E$327 E$396 E$397 = 40xx
E$115 E$256 E$324 E$394 = transistor
E$118 E$173 = Arduino-clone
E$119 E$176 E$429 = con-lstb
E$147-E$152 = wirepad
E$155-E$158 E$427 E$432 E$433 E$438 = con-ebyelectro
E$182-E$187 E$398-E$401 E$409 E$410 E$417 E$418 E$420-E$423 E$428 E$430 E$436 E$437 = holes

## Nets
S$1: E$1.52 E$18.1
S$2: E$1.50 E$19.1
S$3: E$1.34 E$12.3
S$4: E$1.33 E$9.3
S$5: E$2.P$1 E$2.P$5 E$2.P$16 E$47.7 E$48.E
S$6: E$1.54 E$17.1
S$7: E$1.73 E$42.3
S$8: E$1.56 E$16.1
S$9: E$1.58 E$159.7
S$10: E$1.44 E$4.4
S$11: E$1.43 E$4.3
S$12: E$1.26 E$10.3
S$13: E$1.25 E$11.3
S$14: E$1.24 E$13.3
S$15: E$1.23 E$14.3
S$16: E$1.42 E$3.4
S$17: E$1.41 E$3.3
S$18: E$1.40 E$5.4
S$19: E$1.39 E$5.3
S$20: E$2.P$2 E$2.P$15 E$47.8 E$48.A
S$21: E$1.38 E$6.4
S$22: E$1.37 E$6.3
S$23: E$1.36 E$7.4
S$24: E$1.35 E$7.3
S$25: E$1.31 E$29.1
S$27: E$1.32 E$29.2
S$28: E$1.49 E$10.4
S$29: E$1.51 E$11.4
S$30: E$1.53 E$13.4
S$31: E$1.55 E$14.4
S$32: E$1.57 E$12.4
S$33: E$1.59 E$9.4
S$34: E$1.61 E$31.6
S$35: E$1.75 E$42.4
S$36: E$1.76
S$37: E$1.72
S$38: E$1.74
S$39: E$1.70 E$8.1
S$40: E$1.63 E$31.5
S$41: E$1.13 E$143.2
S$42: E$1.11 E$23.1
S$43: E$1.10 E$22.1
S$44: E$1.9 E$21.1
S$45: E$1.8 E$25.1
S$46: E$1.7 E$26.1
S$47: E$1.14 E$143.1
S$48: E$1.65 E$31.4
S$49: E$1.67 E$31.3
S$50: E$1.12 E$24.1
S$51: E$1.15 E$144.2
S$52: E$1.16 E$144.1
S$53: E$1.71 E$31.1
S$54: E$1.69 E$31.2
S$55: E$1.17 E$32.1
S$56: E$149.1 E$153.2 E$162.2
S$57: E$1.60 E$159.6
S$58: E$1.30 E$28.3
S$59: E$1.29 E$28.4
S$60: E$1.28 E$27.3
S$61: E$1.27 E$27.4
S$62: E$1.18 E$39.1
S$63: E$1.19 E$43.1
S$64: E$1.20 E$44.1
S$65: E$1.21 E$45.1
S$66: E$1.22 E$46.1
S$67: E$1.68 E$159.2
S$68: E$1.79 E$41.3
S$69: E$1.77 E$41.4
S$70: E$1.80 E$41.2
S$71: E$1.78 E$41.1
S$72: E$1.66 E$159.3
S$73: E$1.64 E$159.4
S$74: E$1.62 E$159.5
S$75: E$148.1 E$150.1
S$76: E$2.P$4 E$47.6
S$77: E$2.P$6 E$47.5
S$78: E$2.P$14 E$47.1
S$79: E$2.P$13 E$47.2
S$80: E$2.P$12 E$47.3
S$81: E$2.P$11 E$47.4
S$82: E$2.P$3 E$48.S
S$84: E$1.3 E$3.1 E$4.1 E$5.1 E$6.1 E$7.1 E$8.6 E$9.1 E$10.1 E$11.1 E$12.1 E$13.1 E$14.1 E$16.3 E$17.3 E$18.3 E$19.3 E$21.3 E$22.3 E$23.3 E$24.3 E$25.3 E$26.3 E$27.1 E$28.1 E$29.4 E$31.8 E$32.3 E$37.2 E$39.3 E$42.1 E$43.3 E$44.3 E$45.3 E$46.3 E$116.5
S$85: E$1.4 E$1.5 E$1.45 E$1.81 E$1.82 E$3.2 E$4.2 E$5.2 E$6.2 E$7.2 E$8.5 E$9.2 E$10.2 E$11.2 E$12.2 E$13.2 E$14.2 E$16.2 E$17.2 E$18.2 E$19.2 E$21.2 E$22.2 E$23.2 E$24.2 E$25.2 E$26.2 E$27.2 E$28.2 E$29.3 E$31.7 E$32.2 E$37.1 E$39.2 E$42.2 E$43.2 E$44.2 E$45.2 E$46.2 E$116.4 E$159.1 E$172.2
S$86: E$8.4 E$116.3
S$87: E$8.3 E$116.2
S$88: E$8.2 E$116.1
S$95: E$111.6 E$111.7 E$111.8 E$112.6 E$112.7 E$112.8 E$113.2 E$115.1
S$96: E$30.A E$49.1
S$97: E$49.2 E$50.2 E$53.2 E$54.2 E$57.2 E$58.2 E$61.2 E$62.2 E$65.2 E$66.2 E$69.2 E$70.2 E$73.2 E$74.2 E$77.2 E$78.2 E$81.2 E$82.2 E$85.2 E$86.2 E$89.2 E$90.2 E$93.2 E$94.2 E$97.2 E$98.2 E$101.2 E$102.2 E$105.2 E$106.2 E$109.2 E$110.2 E$111.16 E$112.16
S$98: E$33.K E$50.1 E$111.5
S$99: E$111.11 E$112.11 E$113.3
S$100: E$51.A E$53.1
S$101: E$111.10 E$112.10 E$113.4
S$102: E$52.K E$54.1 E$111.4
S$103: E$111.9 E$112.9 E$113.5
S$104: E$55.A E$57.1
S$105: E$113.6 E$117.2
S$106: E$56.K E$58.1 E$111.2
S$107: E$111.3 E$114.2
S$108: E$59.A E$61.1
S$109: E$112.3 E$114.1
S$110: E$60.K E$62.1 E$111.1
S$111: E$115.3 E$117.1
S$112: E$63.A E$65.1
S$113: E$75.K E$76.A E$107.K E$108.A E$115.2
S$114: E$64.K E$66.1 E$111.15
S$116: E$67.A E$69.1
S$118: E$68.K E$70.1 E$111.14
S$120: E$71.A E$73.1
S$122: E$72.K E$74.1 E$111.13
S$124: E$75.A E$77.1
S$125: E$83.K E$84.A
S$126: E$76.K E$78.1 E$111.12
S$127: E$71.K E$72.A
S$128: E$79.A E$81.1
S$129: E$67.K E$68.A
S$130: E$80.K E$82.1 E$112.12
S$131: E$63.K E$64.A
S$132: E$83.A E$85.1
S$133: E$59.K E$60.A
S$134: E$84.K E$86.1 E$112.13
S$135: E$55.K E$56.A
S$136: E$87.A E$89.1
S$137: E$51.K E$52.A
S$138: E$88.K E$90.1 E$112.14
S$139: E$30.K E$33.A
S$140: E$91.A E$93.1
S$141: E$87.K E$88.A
S$142: E$92.K E$94.1 E$112.15
S$143: E$79.K E$80.A
S$144: E$95.A E$97.1
S$145: E$113.1
S$146: E$96.K E$98.1 E$112.1
S$147: E$91.K E$92.A
S$148: E$99.A E$101.1
S$149: E$95.K E$96.A
S$150: E$100.K E$102.1 E$112.2
S$151: E$99.K E$100.A
S$152: E$103.A E$105.1
S$153: E$103.K E$104.A
S$154: E$104.K E$106.1 E$112.4
S$155: E$118.5V E$119.8 E$120.1 E$121.1
S$156: E$107.A E$109.1
S$157: E$118.GND1 E$119.7 E$120.2 E$121.2
S$158: E$108.K E$110.1 E$112.5
S$159: E$118.A5 E$119.6
S$160: E$118.A4 E$119.5
S$161: E$118.D2 E$119.1
S$162: E$118.RX1 E$121.3
S$163: E$118.TX0 E$121.4
S$164: E$122.9 E$132.5 E$133.9
S$168: E$122.6 E$122.7 E$122.8 E$123.2 E$124.2 E$125.2 E$126.2 E$127.2 E$129.2 E$130.2 E$131.2 E$132.2 E$133.6 E$133.7 E$133.8 E$135.2 E$136.2 E$137.2 E$138.2 E$139.2 E$140.2 E$141.2 E$142.2
S$169: E$122.11 E$132.3 E$133.11
S$170: E$133.1 E$140.3
S$171: E$122.10 E$132.4 E$133.10
S$172: E$123.3 E$133.12
S$173: E$124.3 E$133.13
S$174: E$125.3 E$133.14
S$175: E$133.3 E$134.1
S$176: E$122.3 E$134.2
S$177: E$126.3 E$133.15
S$178: E$127.3 E$133.2
S$179: E$38.2 E$146.6
S$180: E$131.3 E$133.4
S$181: E$130.3 E$133.5
S$182: E$122.5 E$139.3
S$183: E$122.4 E$138.3
S$184: E$122.2 E$137.3
S$185: E$122.1 E$136.3
S$186: E$122.12 E$129.3
S$187: E$122.13 E$141.3
S$188: E$122.14 E$142.3
S$189: E$122.15 E$135.3
S$190: E$20.3 E$20.4 E$35.3 E$35.4 E$36.4 E$38.3 E$40.3 E$40.4 E$145.3 E$145.4 E$146.7
S$191: E$122.16 E$123.1 E$124.1 E$125.1 E$126.1 E$127.1 E$129.1 E$130.1 E$131.1 E$132.1 E$133.16 E$135.1 E$136.1 E$137.1 E$138.1 E$139.1 E$140.1 E$141.1 E$142.1
S$192: E$20.1 E$20.2 E$146.1
S$193: E$36.1 E$146.2
S$194: E$35.1 E$35.2 E$146.3
S$195: E$40.2 E$146.5
S$196: E$145.1 E$146.4
S$199: E$147.1 E$153.1 E$161.K
S$200: E$152.1 E$154.2 E$163.2
S$201: E$151.1 E$154.1 E$164.K
S$204: E$161.A E$162.1
S$205: E$163.1 E$164.A
S$209: E$155.1 E$155.2 E$155.3 E$155.4 E$155.5 E$158.1 E$158.2 E$158.3 E$158.4 E$158.5 E$166.2
S$210: E$156.1 E$156.2 E$156.3 E$156.4 E$156.5 E$157.1 E$157.2 E$157.3 E$157.4 E$157.5 E$165.K
S$211: E$165.A E$166.1
S$212: E$167.2 E$168.A
S$213: E$169.P$2 E$169.P$15 E$170.8 E$171.A
S$214: E$169.P$1 E$169.P$5 E$169.P$16 E$170.7 E$171.E
S$215: E$169.P$4 E$170.6
S$216: E$169.P$6 E$170.5
S$217: E$169.P$14 E$170.1
S$218: E$169.P$13 E$170.2
S$219: E$169.P$12 E$170.3
S$220: E$169.P$11 E$170.4
S$221: E$169.P$3 E$171.S
S$225: E$1.1 E$172.1
S$228: E$174.3 E$174.4 E$175.1 E$175.2 E$177.1 E$177.2 E$178.3 E$178.4 E$179.3 E$179.4 E$180.3 E$180.4 E$181.1
S$229: E$179.1 E$179.2 E$181.3
S$230: E$174.1 E$174.2 E$181.4
S$231: E$178.1 E$178.2 E$181.5
S$232: E$180.1 E$180.2 E$181.6
S$233: E$177.3 E$177.4 E$181.7
S$234: E$175.3 E$175.4 E$181.2
S$235: E$188.A E$190.1
S$237: E$189.K E$191.1 E$252.5
S$241: E$192.A E$194.1
S$242: E$193.K E$195.1 E$252.4
S$243: E$196.A E$198.1
S$244: E$197.K E$199.1 E$252.2
S$245: E$200.A E$202.1
S$246: E$201.K E$203.1 E$252.1
S$247: E$204.A E$206.1
S$248: E$212.K E$213.A
S$249: E$208.K E$209.A
S$250: E$204.K E$205.A
S$251: E$200.K E$201.A
S$252: E$196.K E$197.A
S$253: E$192.K E$193.A
S$254: E$188.K E$189.A
S$255: E$232.K E$233.A
S$256: E$228.K E$229.A
S$257: E$220.K E$221.A
S$258: E$224.K E$225.A
S$259: E$236.K E$237.A
S$260: E$240.K E$241.A
S$261: E$244.K E$245.A
S$262: E$216.K E$217.A E$248.K E$249.A E$256.2
S$263: E$205.K E$207.1 E$252.15
S$264: E$208.A E$210.1
S$265: E$209.K E$211.1 E$252.14
S$266: E$212.A E$214.1
S$267: E$213.K E$215.1 E$252.13
S$268: E$216.A E$218.1
S$269: E$217.K E$219.1 E$252.12
S$270: E$220.A E$222.1
S$271: E$221.K E$223.1 E$253.12
S$272: E$224.A E$226.1
S$273: E$225.K E$227.1 E$253.13
S$274: E$228.A E$230.1
S$275: E$229.K E$231.1 E$253.14
S$276: E$232.A E$234.1
S$277: E$233.K E$235.1 E$253.15
S$278: E$236.A E$238.1
S$279: E$237.K E$239.1 E$253.1
S$280: E$240.A E$242.1
S$281: E$241.K E$243.1 E$253.2
S$282: E$244.A E$246.1
S$283: E$245.K E$247.1 E$253.4
S$284: E$248.A E$250.1
S$285: E$249.K E$251.1 E$253.5
S$286: E$252.6 E$252.7 E$252.8 E$253.6 E$253.7 E$253.8 E$254.2 E$256.1
S$287: E$254.1
S$288: E$190.2 E$191.2 E$194.2 E$195.2 E$198.2 E$199.2 E$202.2 E$203.2 E$206.2 E$207.2 E$210.2 E$211.2 E$214.2 E$215.2 E$218.2 E$219.2 E$222.2 E$223.2 E$226.2 E$227.2 E$230.2 E$231.2 E$234.2 E$235.2 E$238.2 E$239.2 E$242.2 E$243.2 E$246.2 E$247.2 E$250.2 E$251.2 E$252.16 E$253.16
S$289: E$252.10 E$253.10 E$254.4
S$290: E$252.11 E$253.11 E$254.3
S$291: E$252.9 E$253.9 E$254.5
S$292: E$254.6 E$257.2
S$293: E$252.3 E$255.2
S$294: E$253.3 E$255.1
S$295: E$256.3 E$257.1
S$301: E$258.A E$260.2
S$302: E$259.K E$261.2 E$327.12
S$303: E$323.2 E$326.3
S$304: E$323.1 E$327.3
S$305: E$262.A E$264.2
S$306: E$263.K E$265.2 E$327.13
S$307: E$322.2 E$324.1 E$326.6 E$326.7 E$326.8 E$327.6 E$327.7 E$327.8
S$308: E$274.A E$276.2
S$309: E$266.A E$268.2
S$310: E$267.K E$269.2 E$327.14
S$311: E$324.3 E$325.1
S$312: E$275.K E$277.2 E$327.1
S$313: E$270.A E$272.2
S$314: E$271.K E$273.2 E$327.15
S$315: E$322.6 E$325.2
S$316: E$322.5 E$326.9 E$327.9
S$317: E$322.4 E$326.10 E$327.10
S$318: E$278.A E$280.2
S$319: E$279.K E$281.2 E$327.2
S$320: E$322.3 E$326.11 E$327.11
S$321: E$282.A E$284.2
S$322: E$283.K E$285.2 E$327.4
S$324: E$286.A E$288.2
S$325: E$287.K E$289.2 E$327.5
S$326: E$328.A E$330.2
S$327: E$290.A E$292.2
S$328: E$291.K E$293.2 E$326.5
S$329: E$329.K E$331.2 E$397.12
S$330: E$332.A E$334.2
S$331: E$294.A E$296.2
S$332: E$295.K E$297.2 E$326.4
S$333: E$333.K E$335.2 E$397.13
S$334: E$298.A E$300.2
S$335: E$299.K E$301.2 E$326.2
S$336: E$336.A E$338.2
S$337: E$302.A E$304.2
S$338: E$303.K E$305.2 E$326.1
S$339: E$337.K E$339.2 E$397.14
S$340: E$306.A E$308.2
S$341: E$307.K E$309.2 E$326.15
S$342: E$340.A E$342.2
S$344: E$173.5V E$176.8 E$424.1 E$425.1
S$345: E$258.K E$259.A E$262.K E$263.A E$266.K E$267.A E$270.K E$271.A E$274.K E$275.A E$278.K E$279.A E$282.K E$283.A E$286.K E$287.A E$290.K E$291.A E$294.K E$295.A E$298.K E$299.A E$302.K E$303.A E$306.K E$307.A E$310.K E$311.A E$314.K E$315.A E$318.K E$319.A E$324.2
S$346: E$173.GND1 E$176.7 E$424.2 E$425.2 E$426.2
S$347: E$173.A5 E$176.6
S$348: E$173.A4 E$176.5
S$349: E$173.D2 E$176.1
S$350: E$310.A E$312.2
S$351: E$311.K E$313.2 E$326.14
S$352: E$341.K E$343.2 E$397.15
S$353: E$314.A E$316.2
S$354: E$315.K E$317.2 E$326.13
S$355: E$344.A E$346.2
S$356: E$318.A E$320.2
S$357: E$319.K E$321.2 E$326.12
S$358: E$260.1 E$261.1 E$264.1 E$265.1 E$268.1 E$269.1 E$272.1 E$273.1 E$276.1 E$277.1 E$280.1 E$281.1 E$284.1 E$285.1 E$288.1 E$289.1 E$292.1 E$293.1 E$296.1 E$297.1 E$300.1 E$301.1 E$304.1 E$305.1 E$308.1 E$309.1 E$312.1 E$313.1 E$316.1 E$317.1 E$320.1 E$321.1 E$322.1 E$326.16 E$327.16
S$359: E$345.K E$347.2 E$397.1
S$360: E$348.A E$350.2
S$361: E$349.K E$351.2 E$397.2
S$362: E$352.A E$354.2
S$363: E$353.K E$355.2 E$397.4
S$364: E$356.A E$358.2
S$365: E$357.K E$359.2 E$397.5
S$366: E$360.A E$362.2
S$367: E$361.K E$363.2 E$396.5
S$368: E$364.A E$366.2
S$369: E$365.K E$367.2 E$396.4
S$370: E$368.A E$370.2
S$371: E$369.K E$371.2 E$396.2
S$372: E$372.A E$374.2
S$373: E$373.K E$375.2 E$396.1
S$374: E$376.A E$378.2
S$375: E$377.K E$379.2 E$396.15
S$376: E$328.K E$329.A E$332.K E$333.A E$336.K E$337.A E$340.K E$341.A E$344.K E$345.A E$348.K E$349.A E$352.K E$353.A E$356.K E$357.A E$360.K E$361.A E$364.K E$365.A E$368.K E$369.A E$372.K E$373.A E$376.K E$377.A E$380.K E$381.A E$384.K E$385.A E$388.K E$389.A E$394.2
S$377: E$380.A E$382.2
S$378: E$381.K E$383.2 E$396.14
S$379: E$384.A E$386.2
S$380: E$385.K E$387.2 E$396.13
S$381: E$388.A E$390.2
S$382: E$389.K E$391.2 E$396.12
S$383: E$330.1 E$331.1 E$334.1 E$335.1 E$338.1 E$339.1 E$342.1 E$343.1 E$346.1 E$347.1 E$350.1 E$351.1 E$354.1 E$355.1 E$358.1 E$359.1 E$362.1 E$363.1 E$366.1 E$367.1 E$370.1 E$371.1 E$374.1 E$375.1 E$378.1 E$379.1 E$382.1 E$383.1 E$386.1 E$387.1 E$390.1 E$391.1 E$392.1 E$396.16 E$397.16
S$384: E$393.2 E$396.3
S$385: E$393.1 E$397.3
S$386: E$392.2 E$394.1 E$396.6 E$396.7 E$396.8 E$397.6 E$397.7 E$397.8
S$387: E$394.3 E$395.1
S$388: E$392.6 E$395.2
S$389: E$392.5 E$396.9 E$397.9
S$390: E$392.4 E$396.10 E$397.10
S$391: E$392.3 E$396.11 E$397.11
S$393: E$402.3 E$402.4 E$403.1 E$403.2 E$404.1 E$404.2 E$405.3 E$405.4 E$406.3 E$406.4 E$407.3 E$407.4 E$408.1
S$394: E$406.1 E$406.2 E$408.3
S$395: E$402.1 E$402.2 E$408.4
S$396: E$405.1 E$405.2 E$408.5
S$397: E$407.1 E$407.2 E$408.6
S$398: E$404.3 E$404.4 E$408.7
S$399: E$403.3 E$403.4 E$408.2
S$401: E$411.3 E$411.4 E$419.3
S$402: E$411.1 E$411.2 E$412.1 E$412.2 E$413.1 E$414.2 E$415.1 E$415.2 E$416.1 E$416.2 E$419.1
S$403: E$412.3 E$419.2
S$404: E$413.3 E$419.4
S$405: E$414.4 E$419.5
S$406: E$416.3 E$419.6
S$407: E$415.3 E$415.4 E$419.7
S$410: E$173.RX1 E$425.3
S$411: E$173.TX0 E$425.4
S$412: E$429.7 E$431.2
S$414: E$429.1 E$431.4
S$415: E$429.2 E$431.3
S$417: E$429.3 E$429.4 E$429.8 E$431.1
S$419: E$173.RST E$426.1
S$421: E$432.1 E$432.2 E$432.3 E$432.4 E$432.5 E$432.6 E$434.1
S$422: E$433.1 E$433.2 E$433.3 E$433.4 E$433.5 E$433.6 E$435.K
S$423: E$434.2 E$435.A
S$424: E$167.1 E$427.1 E$427.2 E$427.3 E$427.4
S$425: E$168.K E$438.1 E$438.2 E$438.3 E$438.4

## Tracks (layer width: path | path; a pad name or v marks a point on that pad's centre or on a via)
S$1
  Bottom 1.016: E$1.52 280.99,95.88 284.48,99.38 284.48,105.09 280.35,109.22 E$18.1
S$2
  Bottom 1.016: E$19.1 271.14,109.22 275.91,104.46 280.35,104.46 282.57,102.23 282.57,100.01 280.99,98.42 E$1.50
S$3
  Bottom 1.016: E$1.34 239.71,99.69 237.81,97.79 230.82,97.79 228.92,95.88 E$12.3
S$4
  Bottom 1.016: E$1.33 242.25,99.69 237.81,95.25 237.81,92.71 236.54,91.44 230.82,91.44 228.92,89.53 E$9.3
S$5
  Bottom 0.813: E$47.7 535.94,251.46 | 535.94,251.46 535.94,251.78 533.08,254.63 526.1,254.63 E$48.E 521.49,250.03 E$2.P$1 521.49,244.32 523.24,242.57 530.54,242.57 531.65,243.68 E$2.P$5 | E$2.P$16 559.59,245.91 552.13,253.36 537.84,253.36 535.94,251.46
S$6
  Bottom 1.016: E$1.54 280.99,93.34 286.7,99.06 E$17.1
S$7
  Bottom 0.813: E$1.73 275.59,67.94 267.02,59.37 E$42.3
S$8
  Bottom 1.016: E$1.56 281.94,90.8 286.07,94.93 E$16.1
S$9
  Bottom 1.016: E$159.7 290.2,89.85 284.16,89.85 282.57,88.27 E$1.58
S$10
  Bottom 1.016: E$1.44 213.04,103.5 E$4.4
S$11
  Bottom 1.016: E$1.43 215.58,104.14 210.5,109.22 E$4.3
S$12
  Bottom 1.016: E$1.26 262.57,99.69 260.67,97.79 253.68,97.79 251.78,95.88 E$10.3
S$13
  Bottom 1.016: E$1.25 265.11,99.69 256.86,91.44 253.05,91.44 251.78,90.17 E$11.3
S$14
  Bottom 1.016: E$1.24 267.65,99.69 258.13,90.17 258.13,86.99 256.22,85.09 253.68,85.09 251.78,83.18 E$13.3
S$15
  Bottom 1.016: E$1.23 270.19,99.69 260.03,89.53 260.03,82.55 256.22,78.74 253.68,78.74 251.78,76.83 E$14.3
S$16
  Bottom 1.016: E$1.42 218.12,105.41 E$3.4
S$17
  Bottom 1.016: E$1.41 220.66,106.68 218.12,109.22 E$3.3
S$18
  Bottom 1.016: E$1.40 223.2,106.04 E$5.4
S$19
  Bottom 1.016: E$1.39 225.74,102.87 227.01,104.14 227.01,107.31 225.11,109.22 E$5.3
S$20  (via drill 0.6 pad 1.93)
  Top 0.813: v519.11,248.92 v523.56,248.92
  Bottom 0.813: E$2.P$2 524.03,245.59 524.19,245.75 524.19,246.06 523.56,246.7 v523.56,248.92 524.83,249.87 527.05,252.09 528.64,252.09 E$48.A 531.18,250.19 E$47.8 | E$2.P$15 557.05,243.68 554.67,241.3 521.02,241.3 519.11,243.2 v519.11,248.92
S$21
  Bottom 1.016: E$1.38 229.55,105.41 E$6.4
S$22
  Bottom 1.016: E$6.3 232.73,109.22 234,107.95 234,105.41 232.09,103.5 E$1.37
S$23
  Bottom 1.016: E$1.36 234.63,103.5 E$7.4
S$24
  Bottom 1.016: E$1.35 237.17,102.23 240.98,106.04 240.98,107.95 239.71,109.22 E$7.3
S$25
  Bottom 1.016: E$29.1 246.06,103.5 247.33,102.23 E$1.31
S$26
  Bottom 1.016: 201.29,118.43 300.67,118.43 300.67,35.24 201.29,35.24 201.29,118.43
S$27
  Bottom 1.016: E$29.2 244.79,109.22 243.21,107.63 243.21,103.82 244.79,102.23 E$1.32
S$28  (via drill 0.6 pad 1.93)
  Top 1.016: v256.86,94.61 v268.92,94.61
  Bottom 1.016: E$10.4 v256.86,94.61 | E$1.49 271.46,98.42 268.92,95.88 v268.92,94.61
S$29  (via drill 0.6 pad 1.93)
  Top 1.016: v255.59,88.27 v262.57,88.27
  Bottom 1.016: E$11.4 v255.59,88.27 | E$1.51 272.73,95.88 271.46,94.61 271.46,93.34 270.19,92.07 266.38,92.07 v262.57,88.27
S$30  (via drill 0.6 pad 1.93)
  Top 1.016: v262.57,83.18 v257.49,83.18
  Bottom 1.016: E$1.53 274,93.34 270.83,90.17 269.56,90.17 v262.57,83.18 | v257.49,83.18 256.86,83.18 255.59,81.91 E$13.4
S$31
  Bottom 1.016: E$1.55 274,90.8 263.84,80.64 261.3,80.64 256.22,75.56 E$14.4
S$32  (via drill 0.6 pad 1.93)
  Top 1.016: v235.27,94.61 v240.98,94.61
  Bottom 1.016: E$12.4 v235.27,94.61 | v240.98,94.61 240.98,75.56 244.79,71.75 255.59,71.75 262.57,78.74 265.11,78.74 274.64,88.27 E$1.57
S$33
  Bottom 1.016: E$1.59 274.64,85.72 265.75,76.83 263.21,76.83 256.22,69.85 243.52,69.85 238.76,74.61 238.76,84.77 235.27,88.27 E$9.4
S$34
  Bottom 1.016: E$1.61 274.64,83.18 266.38,74.93 263.84,74.93 255.59,66.67 E$31.6
S$35
  Bottom 0.813: E$1.75 276.54,65.41 269.56,58.42 E$42.4
S$36
  Bottom 0.813: E$1.76 281.94,65.41 285.11,62.23 286.7,62.23
  Bottom 1.27: 286.7,62.23 293.37,62.23
S$37
  Bottom 0.813: E$1.72 282.26,70.48 285.43,67.31 286.7,67.31
  Bottom 1.27: 286.7,67.31 293.37,67.31
S$38
  Bottom 0.813: E$1.74 281.94,67.94 285.11,64.77 286.7,64.77
  Bottom 1.27: 293.37,64.77 286.7,64.77
S$39  (via drill 0.6)
  Top 0.813: E$8.1 v285.75,69.85
  Bottom 0.813: v285.75,69.85 282.57,73.02 E$1.70
S$40
  Bottom 1.016: E$1.63 274.64,80.64 267.02,73.02 264.48,73.02 258.13,66.67 E$31.5
S$41
  Bottom 0.813: E$1.13 249.87,48.89 247.02,46.04 E$143.2
S$42
  Bottom 0.813: E$23.1 238.76,44.45 244.79,50.48 E$1.11
S$43
  Bottom 0.813: E$22.1 232.73,44.45 234.95,46.67 237.81,46.67 242.25,51.12 E$1.10
S$44
  Bottom 0.813: E$21.1 223.2,45.4 224.47,46.67 232.09,46.67 233.68,48.26 236.86,48.26 239.71,51.12 E$1.9
S$45
  Bottom 0.813: E$1.8 237.17,51.43 235.58,49.85 232.73,49.85 231.14,48.26 219.08,48.26 216.85,46.04 E$25.1
S$46
  Bottom 0.813: E$1.7 234.31,52.39 232.73,52.39 230.19,49.85 214.63,49.85 210.5,45.72 E$26.1
S$47
  Bottom 0.813: E$1.14 252.41,48.89 249.56,46.04 E$143.1
S$48
  Bottom 1.016: E$1.65 274.64,78.1 267.65,71.12 265.11,71.12 260.67,66.67 E$31.4
S$49
  Bottom 1.016: E$1.67 274.64,75.56 268.29,69.21 265.75,69.21 263.21,66.67 E$31.3
S$50
  Bottom 0.813: E$1.12 247.33,49.53 E$24.1
S$51
  Bottom 0.813: E$1.15 257.49,51.12 252.73,46.35 E$144.2
S$52
  Bottom 0.813: E$1.16 260.03,50.8 255.27,46.04 E$144.1
S$53
  Bottom 1.016: E$1.71 274.64,70.48 268.92,64.77 E$31.1
S$54
  Bottom 1.016: E$1.69 274.64,73.02 268.92,67.31 266.38,67.31 265.75,66.67 E$31.2
S$55
  Bottom 0.813: E$1.17 262.57,46.99 E$32.1
S$56
  Bottom 2.184: E$162.2 258.13,11.11 264.32,4.92 E$149.1 267.69,1.55 E$153.2
S$57
  Bottom 1.016: E$1.60 283.53,85.72 284.8,86.99 E$159.6
S$58
  Bottom 1.016: E$1.30 252.41,102.87 250.51,104.77 250.51,107.63 252.09,109.22 E$28.3
S$59
  Bottom 1.016: E$1.29 254.95,104.77 E$28.4
S$60
  Bottom 1.016: E$1.28 257.49,107.95 258.76,109.22 E$27.3
S$61
  Bottom 1.016: E$1.27 E$27.4
S$62
  Bottom 0.813: E$1.18 265.11,45.72 E$39.1
S$63
  Bottom 0.813: E$1.19 267.65,47.94 271.14,44.45 E$43.1
S$64
  Bottom 0.813: E$1.20 270.19,49.21 273.05,46.35 274.32,46.35 276.22,44.45 E$44.1
S$65
  Bottom 0.813: E$45.1 283.21,44.45 280.03,47.62 275.59,47.62 272.73,50.48 E$1.21
S$66
  Bottom 0.813: E$46.1 289.56,44.45 286.07,47.94 283.53,47.94 282.26,49.21 277.81,49.21 275.27,51.75 E$1.22
S$67
  Bottom 1.016: E$159.2 286.39,76.83 285.11,75.56 E$1.68
S$68
  Bottom 0.813: E$41.3 288.92,52.07 287.97,53.02 280.03,53.02 275.59,57.47 275.59,59.05 276.86,60.32 E$1.79
S$69
  Bottom 0.813: E$1.77 276.86,62.86 274,60.01 274,57.15 280.03,51.12 286.07,51.12 E$41.4
S$70
  Bottom 0.813: E$1.80 280.67,60.32 282.89,58.1 282.89,55.88 284.48,54.29 288.92,54.29 291.46,51.75 E$41.2
S$71
  Bottom 0.813: E$1.78 281.31,62.86 284.16,60.01 284.16,56.51 285.11,55.56 290.51,55.56 294,52.07 E$41.1
S$72
  Bottom 1.016: E$159.3 286.07,79.38 284.8,78.1 E$1.66
S$73
  Bottom 1.016: E$1.64 284.48,80.64 285.75,81.91 E$159.4
S$74
  Bottom 1.016: E$159.5 285.11,84.45 283.85,83.18 E$1.62
S$75
  Bottom 3.81: E$150.1 E$148.1
S$76
  Bottom 0.813: E$2.P$4 529.11,245.27 531.18,247.33 537.21,247.33 538.48,248.6 E$47.6
S$77
  Bottom 0.813: E$47.5 541.02,248.92 536.89,244.79 534.23,244.79 E$2.P$6
S$78
  Bottom 0.813: E$47.1 551.18,248.92 554.36,245.75 554.36,244.98 E$2.P$14
S$79
  Bottom 0.813: E$47.2 548.64,248.92 551.81,245.75 551.81,244.98 E$2.P$13
S$80
  Bottom 0.813: E$47.3 546.1,247.33 546.74,246.7 548.32,246.7 549.59,245.43 549.59,244.98 E$2.P$12
S$81
  Bottom 0.813: E$47.4 543.56,247.01 545.78,244.79 546.86,244.79 E$2.P$11
S$82
  Bottom 0.813: E$2.P$3 526.57,247.17 E$48.S
S$83
  Bottom 0.813: 510.86,256.22 610.24,256.22 610.24,238.12 510.86,238.12 510.86,256.22
S$84  (via drill 0.6 pad 1.93)  (15 unrouted)
  Top 1.27: v232.73,60.64 v222.57,60.64 | v243.52,77.47 v236.22,77.47 | v228.92,77.47 v223.84,77.47
  Bottom 0.813: E$42.1 256.54,57.78 250.51,63.82 E$31.8
  Bottom 1.016: E$8.6 E$116.5 | E$26.3 E$25.3 E$24.3
  Bottom 1.27: E$12.1 E$9.1 | E$10.1 E$13.1 E$14.1 245.43,75.56 v243.52,77.47 | E$46.3 E$32.3 257.81,39.37 257.49,38.42 244.79,38.42 243.84,39.37 E$24.3 | E$25.3 208.6,39.37 204.47,43.5 204.47,59.37 209.83,64.73 E$37.2 | E$1.3 221.93,57.47 220.19,59.21 | 220.19,59.21 214.63,64.77 212.45,64.77 E$37.2 | E$12.1 v223.84,77.47 223.84,76.16 E$37.2 | E$31.8 236.86,64.77 v232.73,60.64 | v222.57,60.64 221.62,60.64 220.19,59.21 | v236.22,77.47 v228.92,77.47 | E$12.1 210.5,94.61 204.47,100.65 204.47,111.76 207.01,114.3 E$4.1 E$27.1 E$18.3 282.57,114.3 291.78,105.09 E$17.3 | E$16.3 E$17.3 | E$17.3 291.78,95.57 297.81,89.53 297.81,58.74 296.23,57.15 E$116.5
S$85  (via drill 0.6 pad 1.93)  (17 unrouted)
  Top 1.27: v225.74,57.78 v216.85,57.78
  Bottom 0.813: E$42.2 264.48,59.05 262.26,61.28 255.59,61.28 253.05,63.82 E$31.7
  Bottom 1.016: E$8.5 E$116.4 294.96,59.69 295.91,60.64 295.91,70.48 292.1,74.29 E$159.1 | 210.5,111.76 207.96,111.76 206.69,110.49 206.69,106.04 210.5,102.23 E$1.45 210.5,99.06 211.77,97.79 224.47,97.79 226.38,95.88 E$12.2 | E$24.2 E$26.2 | E$10.2 249.24,96.52 249.87,97.16 249.87,102.87 248.92,103.82 248.92,111.76 | E$29.3 248.92,111.76 | 248.92,111.76 E$27.2
  Bottom 1.27: E$29.3 210.5,111.76 E$4.2 | E$12.2 E$9.2 226.38,58.42 v225.74,57.78 | E$14.2 E$10.2 | 225.74,52.7 E$1.5 | E$26.2 209.23,41.91 207.01,44.13 207.01,52.39 | 207.01,52.39 207.01,54.33 E$37.1 214.35,57.78 v216.85,57.78 | E$46.2 E$32.2 257.49,41.91 256.22,40.64 246.06,40.64 244.79,41.91 E$24.2 | E$1.4 225.74,52.7 | 225.74,52.7 v225.74,57.78 | E$31.7 253.05,66.67 251.78,67.94 235.9,67.94 v225.74,57.78 | E$27.2 E$19.2 E$18.2 281.31,111.76 289.24,103.82 E$17.2 E$16.2 289.24,93.66 291.15,91.76 292.42,91.76 293.69,90.49 293.69,75.88 292.1,74.29 | E$172.2 207.33,52.7 207.01,52.39
S$86  (1 unrouted)
S$87  (1 unrouted)
S$88  (1 unrouted)
S$89  (via drill 0.6 pad 3.3)
  other vias: 298.13,115.89
S$90  (via drill 0.6 pad 3.3)
  other vias: 349.57,17.14
S$91  (via drill 0.6 pad 3.3)
  other vias: 203.84,115.89
S$92  (via drill 0.6 pad 3.3)
  other vias: 203.84,37.78
S$93  (via drill 0.6 pad 3.3)
  other vias: 514.03,244.79
S$94  (via drill 0.6 pad 3.3)
  other vias: 607.06,244.79
S$95  (via drill 0.6 pad 1.93)  (1 unrouted)
  Top 0.813: v404.18,95.25 v392.75,95.25
  Bottom 0.813: E$113.2 446.41,91.44 447.36,90.49 451.8,90.49 452.44,91.12 464.5,91.12 465.77,89.85 470.53,89.85 | 481.65,93.98 481.65,95.25 | 481.65,95.25 481.65,96.2 481.33,96.52 E$112.6 | E$112.7 481.65,95.25 | E$111.6 403.54,96.52 403.54,95.57 | 403.54,95.57 403.54,94.93 | 403.54,94.93 403.54,93.98 E$111.8 | E$111.7 403.22,95.25 403.54,95.57 | v392.75,95.25 375.54,95.25 | v404.18,95.25 403.86,95.25 403.54,94.93 | 470.53,89.85 478.47,89.85 481.65,93.66 481.65,93.98 | E$115.1 375.28,92.71 377.82,90.17 394.34,90.17 397.19,87.31 428.94,87.31 430.85,85.41 468.95,85.41 470.53,86.99 470.53,89.85 | E$112.8 481.65,93.98
S$96
  Bottom 1.27: E$49.1 430.53,115.89 E$30.A
S$97  (via drill 0.6 pad 1.93)
  Top 0.813: v398.78,107 v398.78,112.08 | v476.88,107 v476.88,112.08
  Bottom 0.813: 394.02,102.87 E$111.16 397.83,102.87 398.78,103.82 v398.78,107 | v398.78,112.08 396.56,112.08 E$66.2 | E$112.16 476.25,102.87 476.88,103.5 v476.88,107 | v476.88,112.08 477.84,113.03 E$98.2